# Altium PCB CORE_FPGA.PcbDoc (part 1 of 3)
Units mil, origin at the board's own origin, x right, y up, seen from the top; angles counter-clockwise.
Board outline 2362.21 x 2755.91 mil, 6 copper layers (TOP, GND, PWR1, PWR2, 3.3V, BOTTOM), stack 58.111 mil thick; 162 components, 160 nets, 858 pads, 377 vias.
Unrouted connection lines stored in the file: 4.
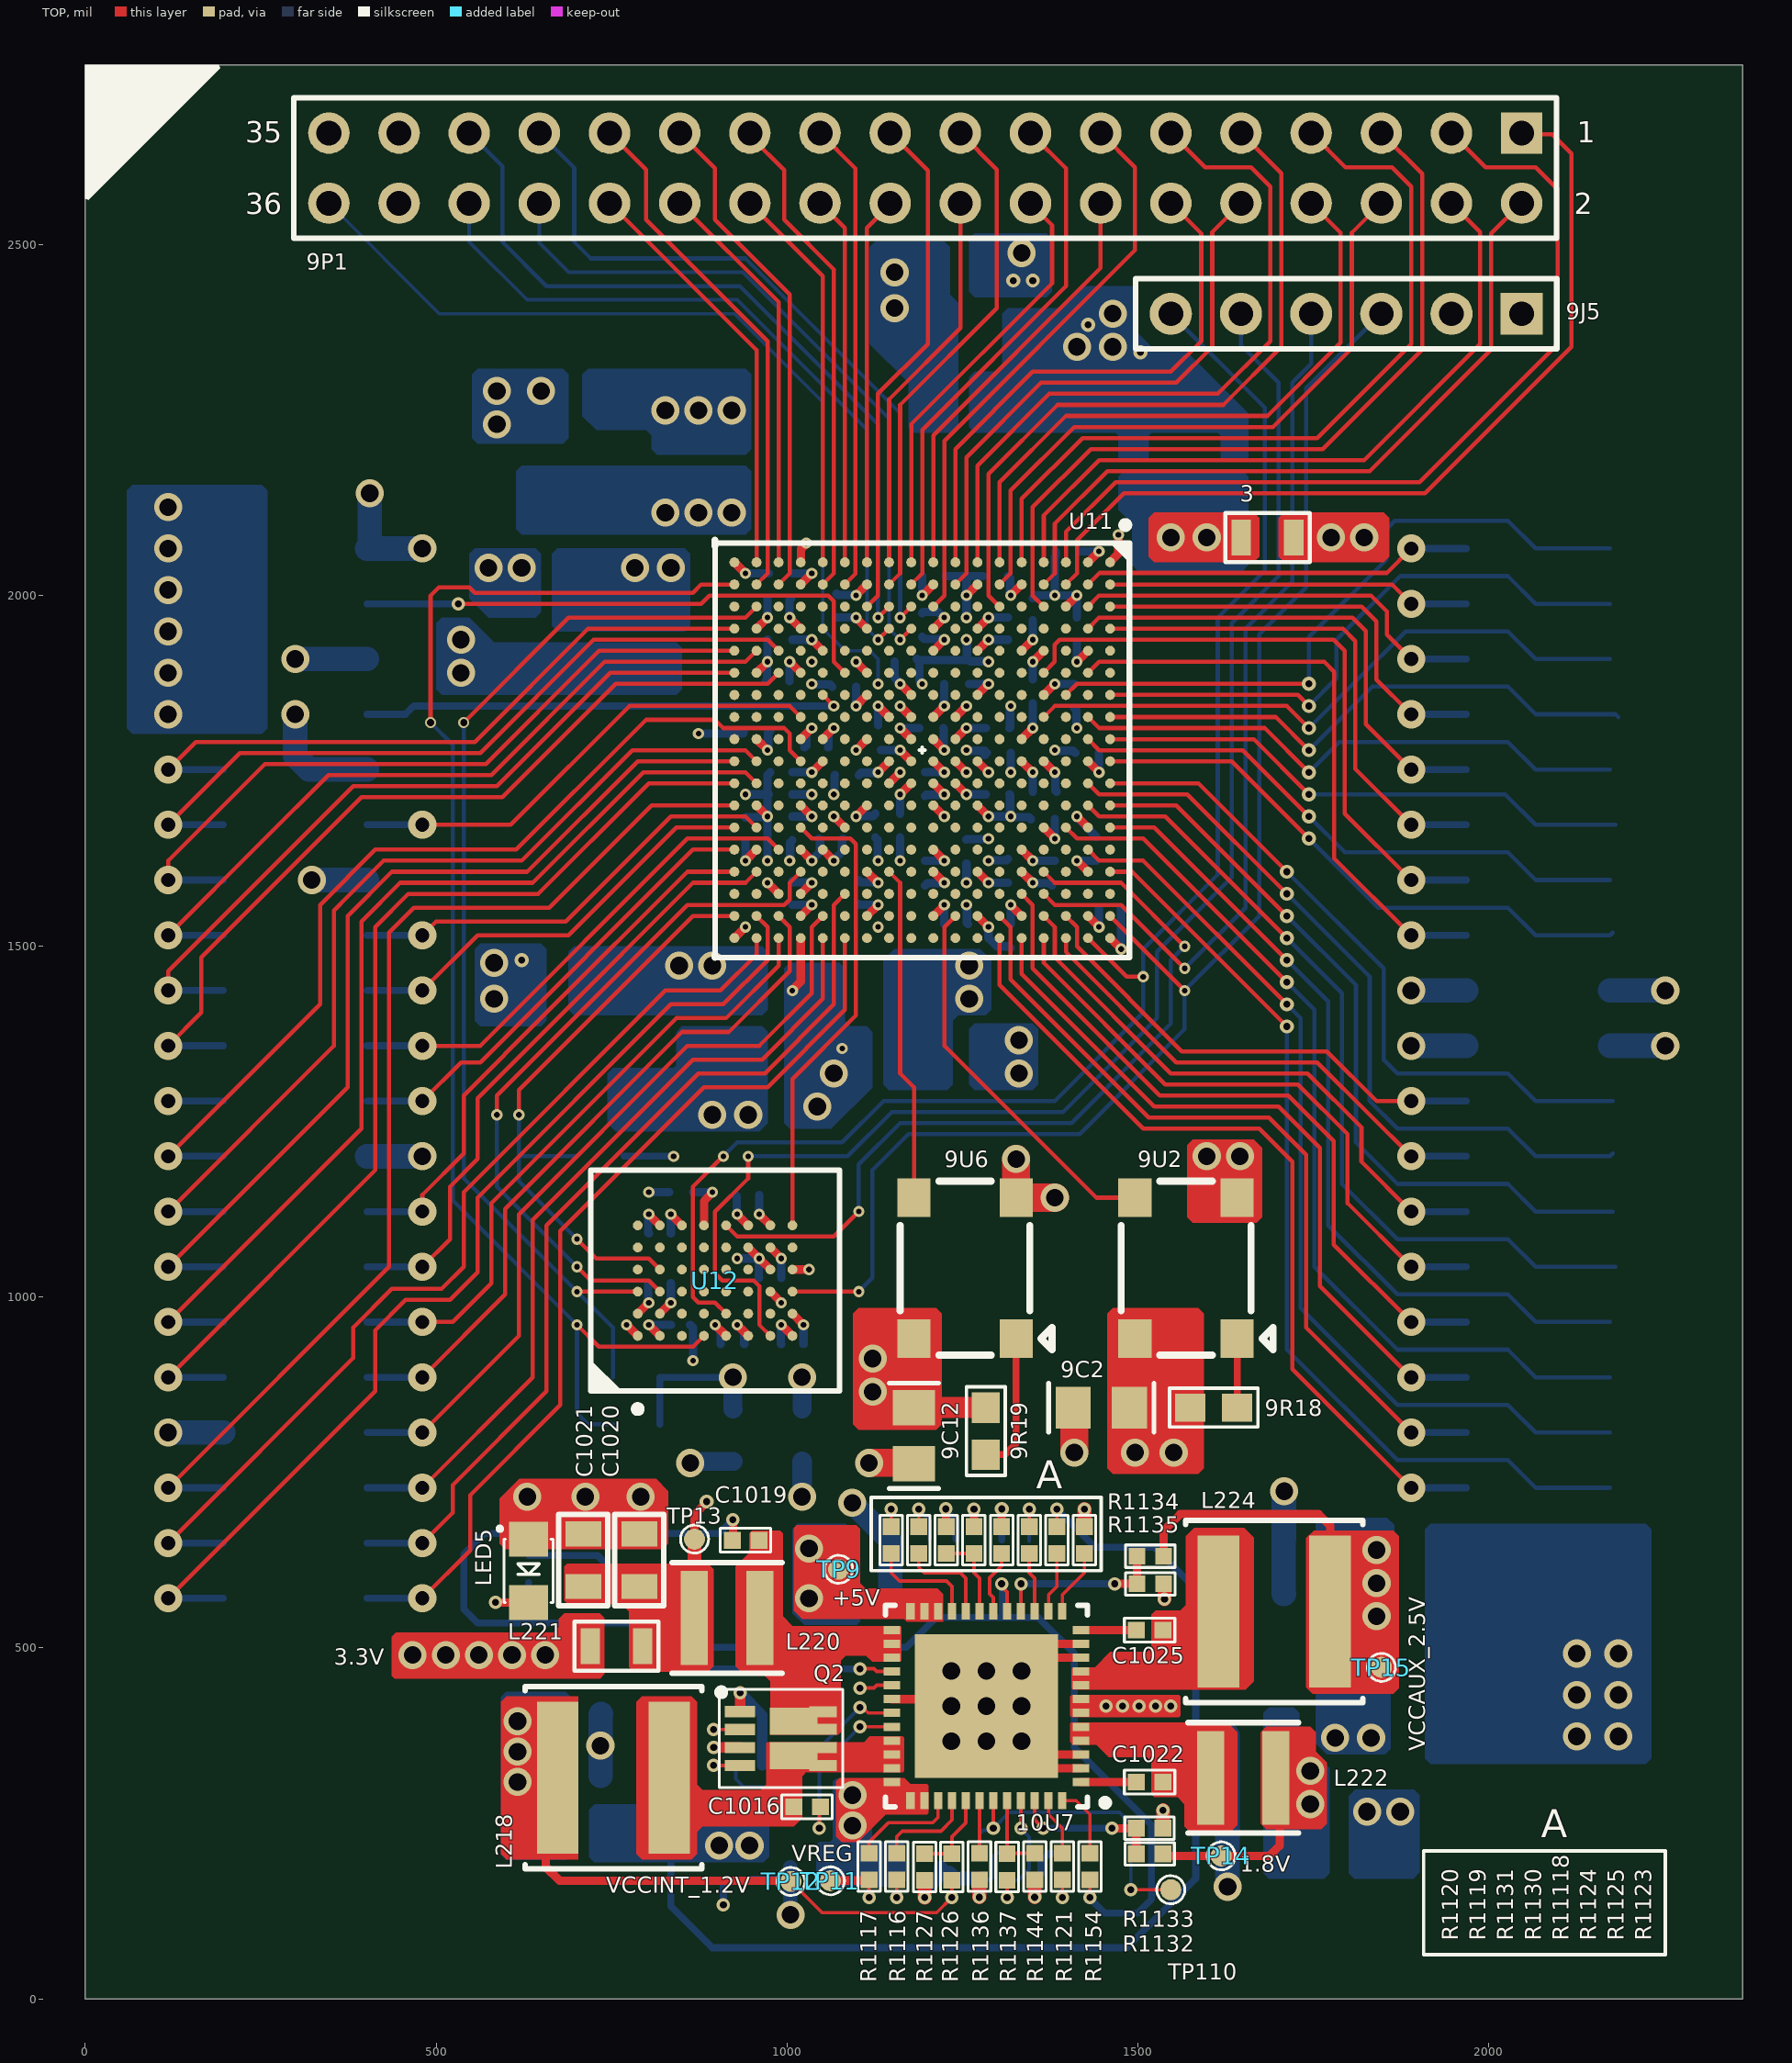
[diagram p0: TOP view]
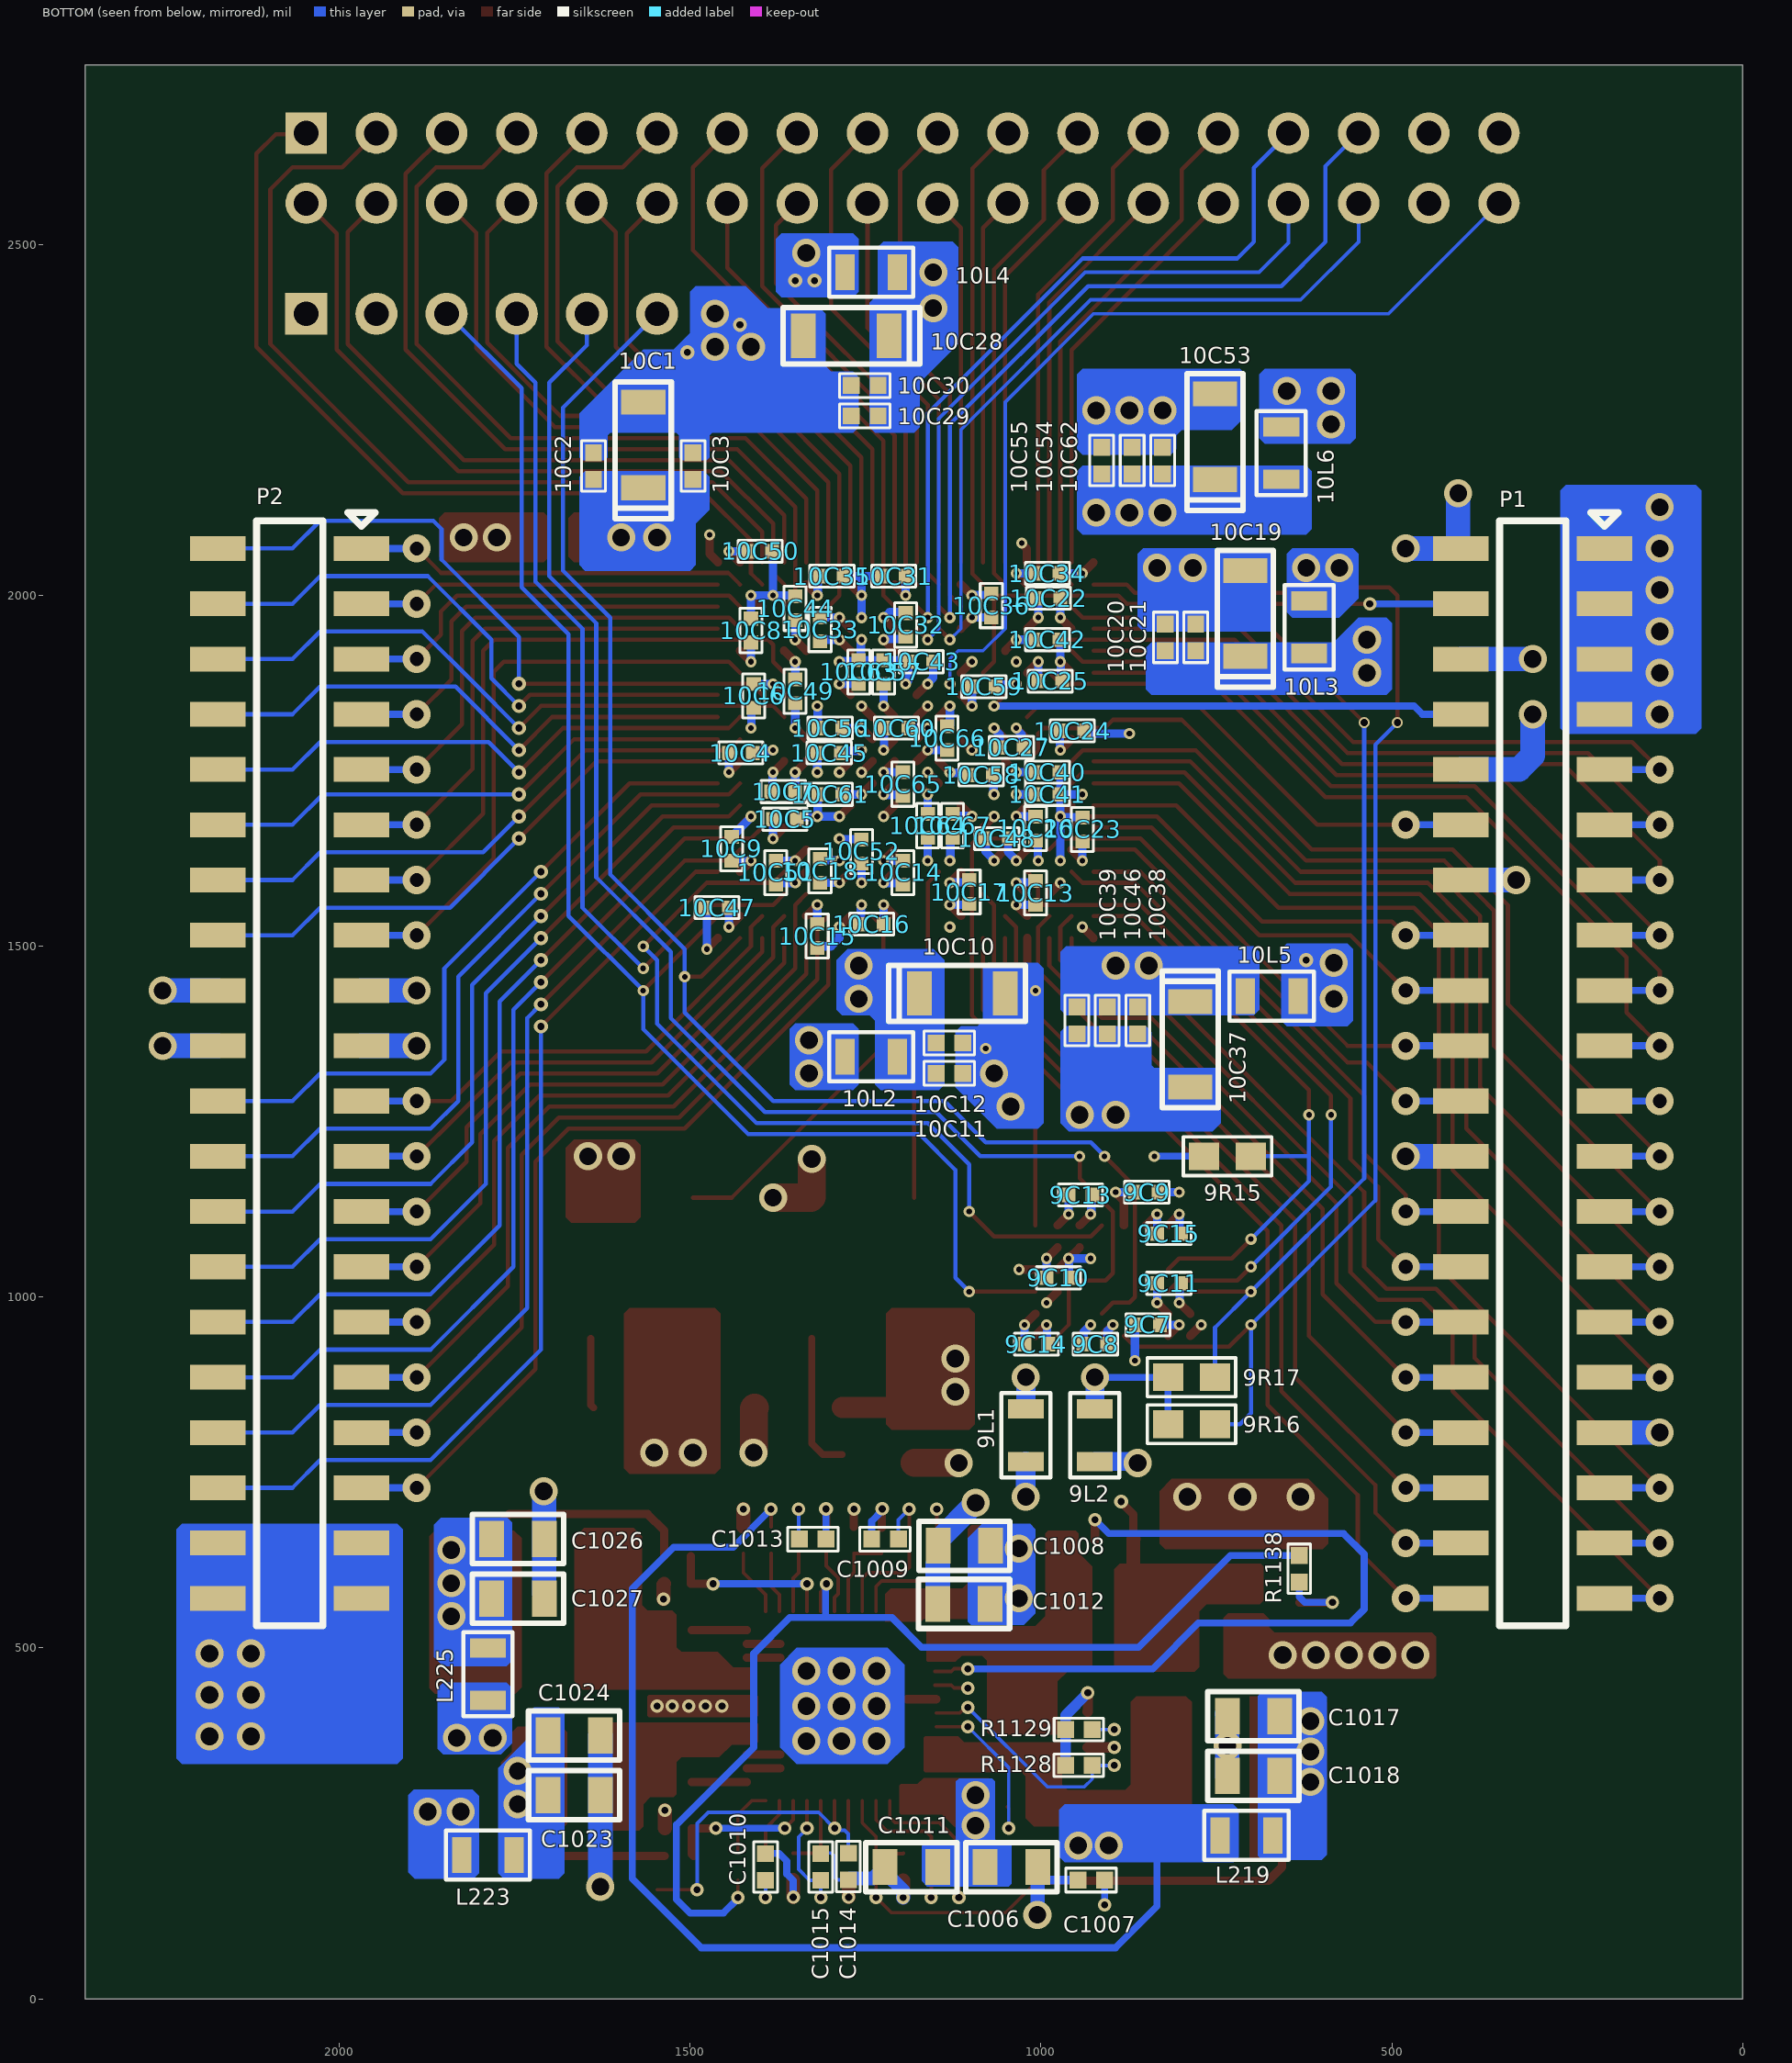
[diagram p1: BOTTOM view, seen from below]
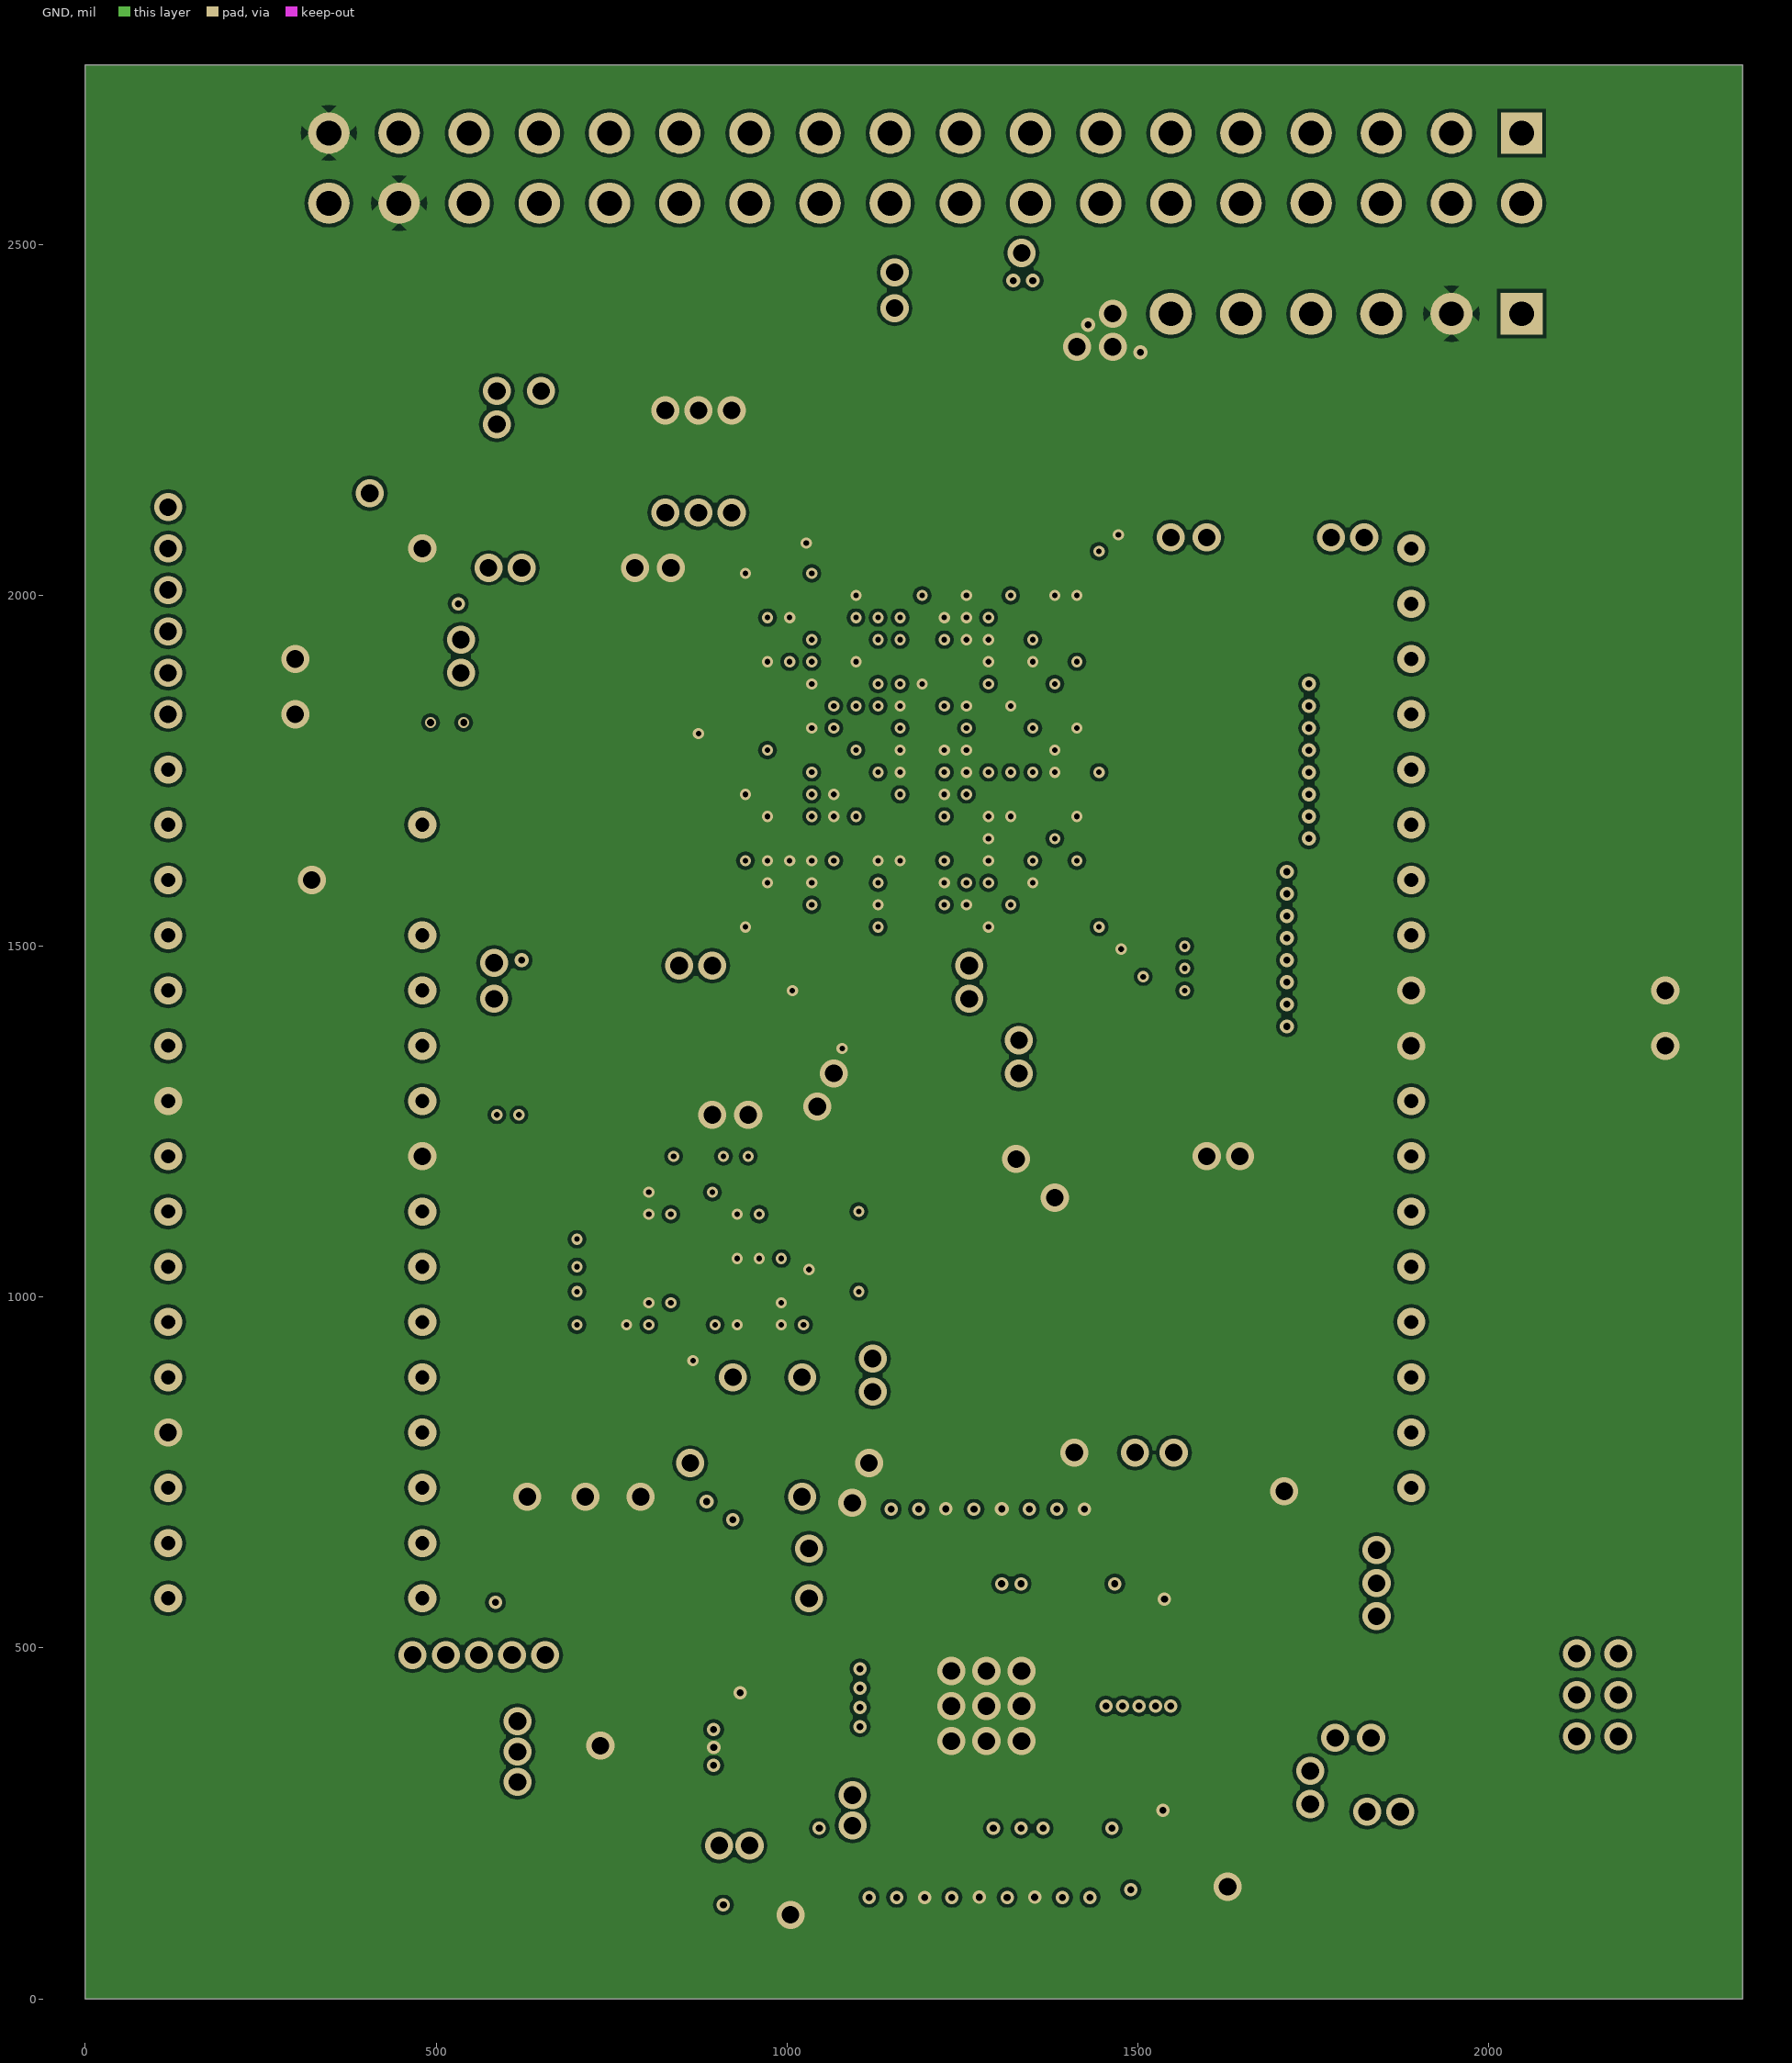
[diagram p2: GND]
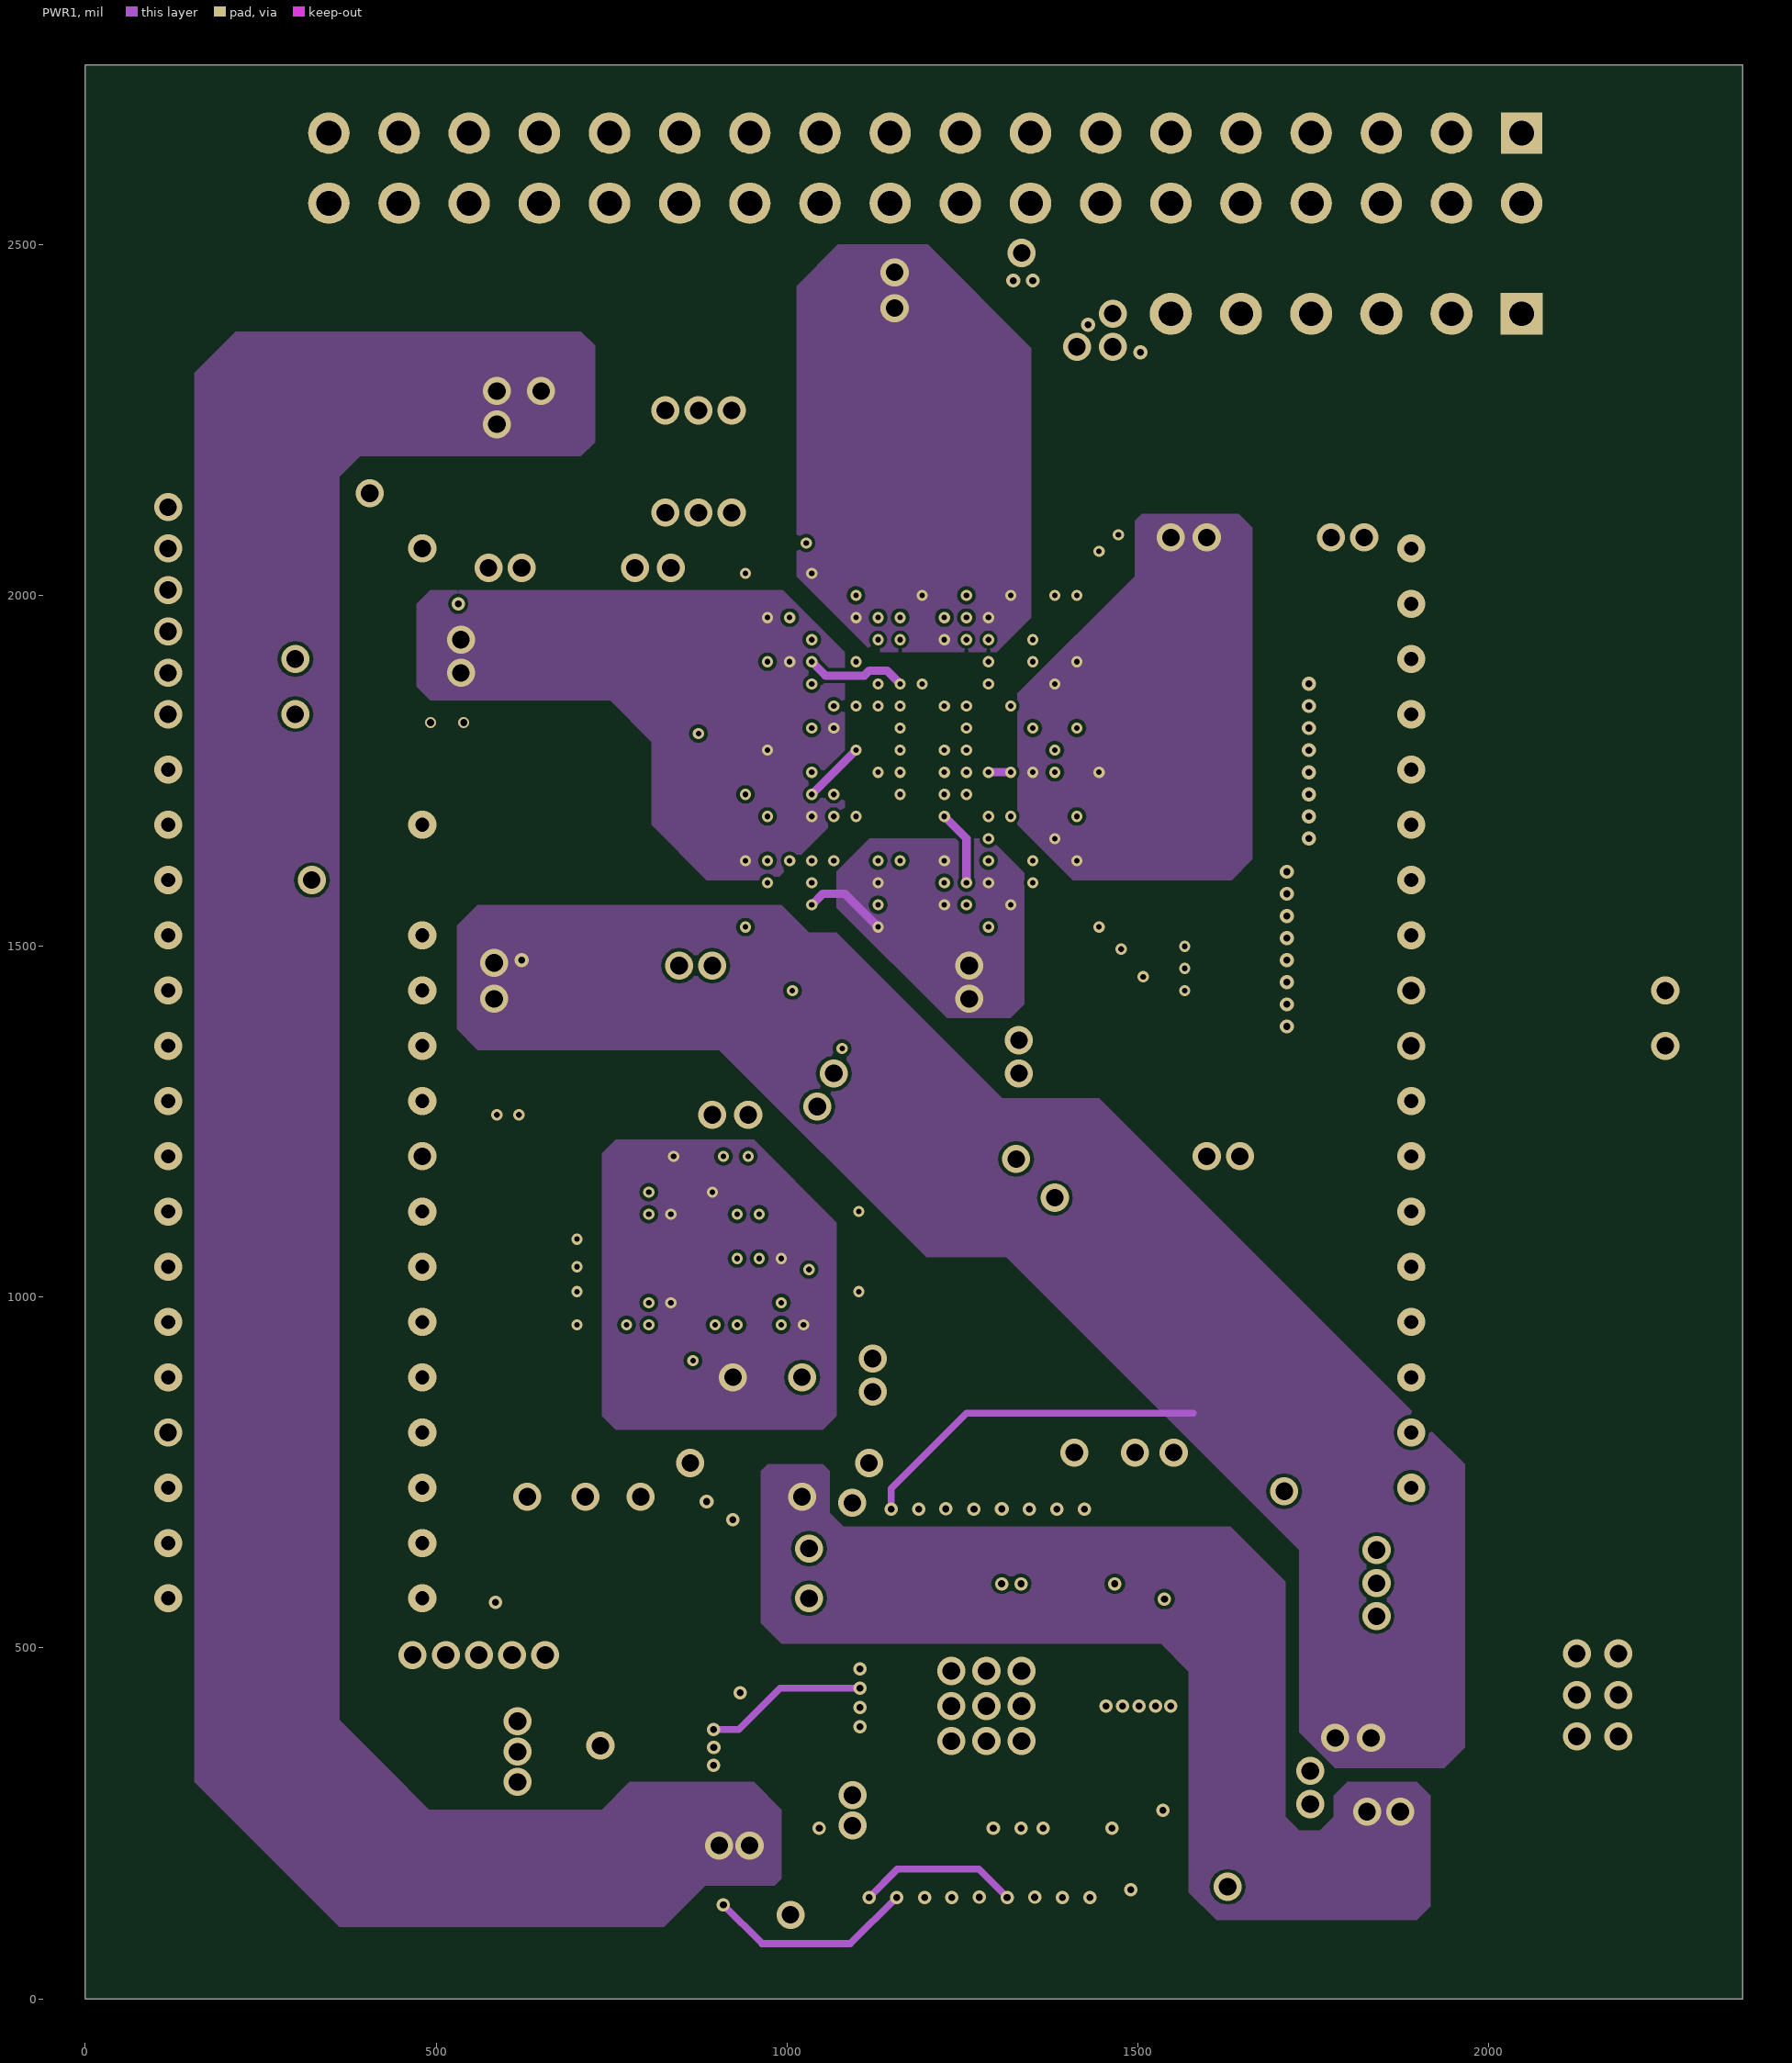
[diagram p3: PWR1]
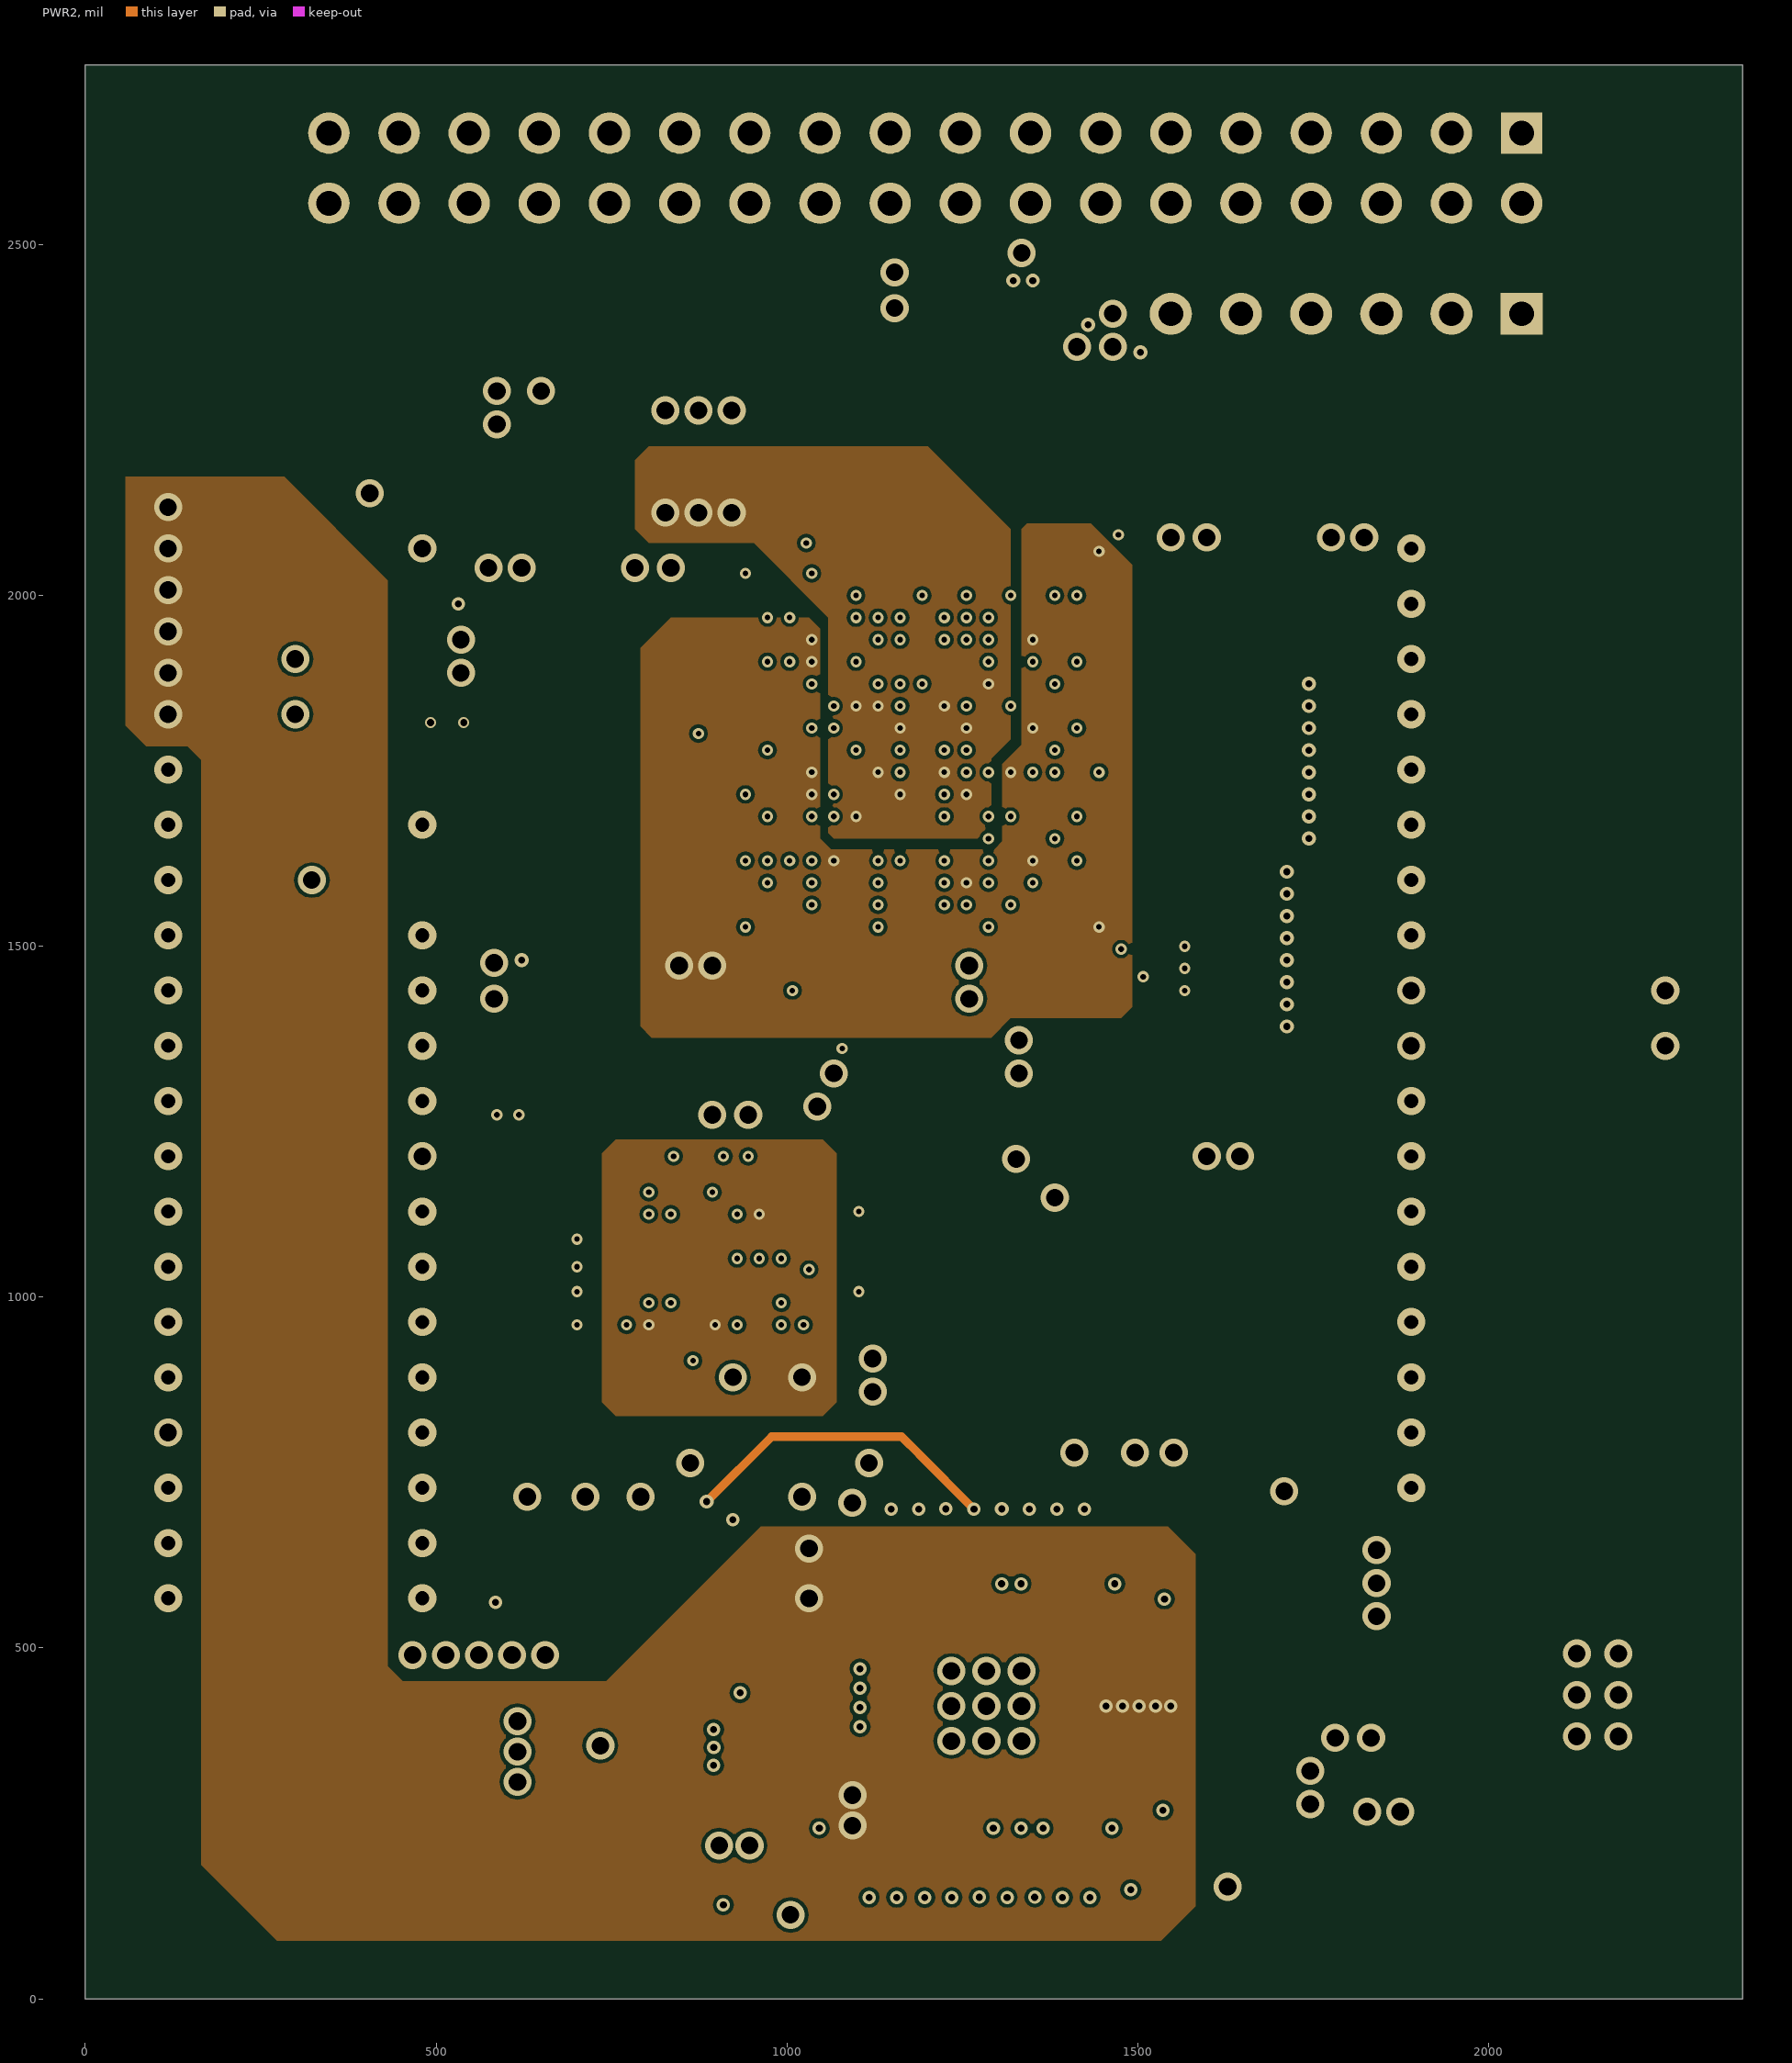
[diagram p4: PWR2]
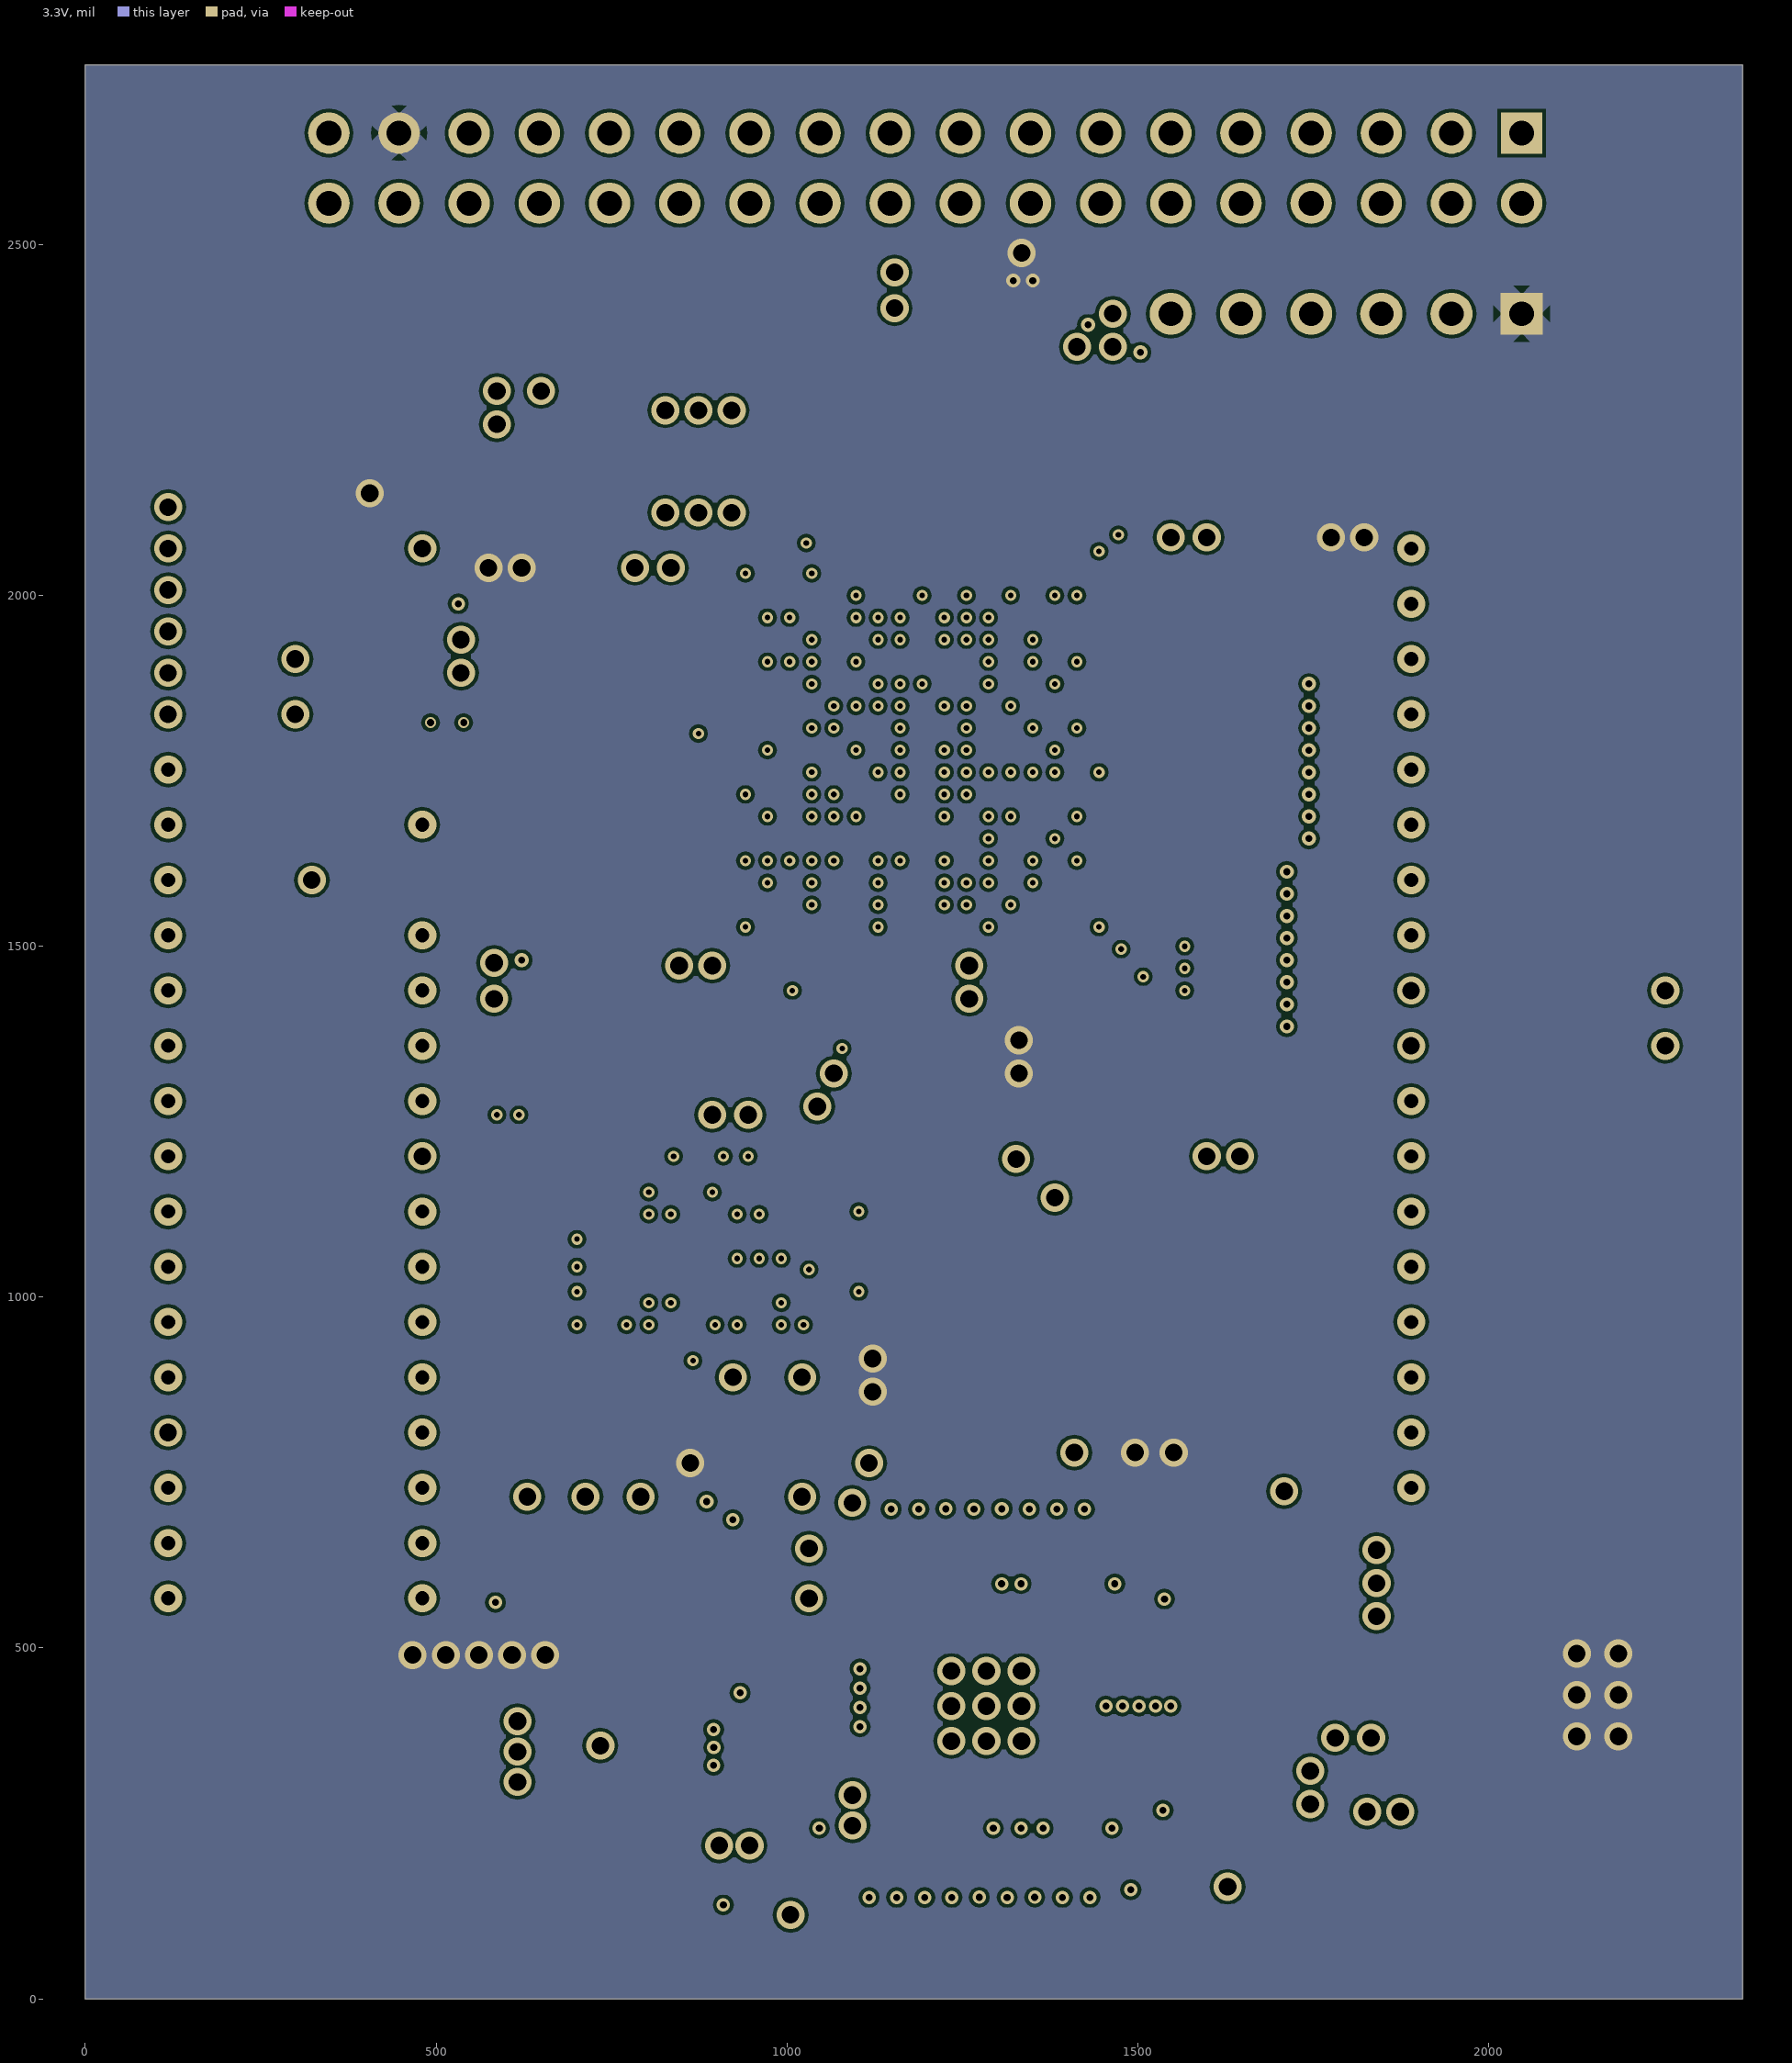
[diagram p5: 3.3V]

## Layer stack, top to bottom
Top Solder: solder mask 0.4, Solder Resist, Dk 3.2
TOP: signal copper 2
Dielectric 1-2: prepreg 4.3, FR-4, Dk 4.04
GND: signal copper 1.3778
Dielectric 2-3: core 6, FR-4, Dk 4.04
PWR1: signal copper 1.3778
Dielectric 3-4: prepreg 28, FR-4, Dk 4.04
PWR2: signal copper 1.3778
Dielectric 4-5: core 6, FR-4, Dk 4.04
3.3V: signal copper 1.3778
Dielectric 5-6: prepreg 4.3, FR-4, Dk 4.04
BOTTOM: signal copper 2
Bottom Solder: solder mask 0.4, Solder Resist, Dk 3.2

## Board outline
0,0 2362.2,0 2362.2,2755.91 0,2755.91

## Design rules (kind name [scope] priority, off if disabled: settings)
AcuteAngle [All] p1 off: minimum=4.50000000000000E+0001 checktracksonly=TRUE
AssemblyTestPointUsage [All] p1 off:
AssemblyTestpoint [All] p1 off: testpointundercomponent=TRUE minsize=40 maxsize=100 preferedsize=60 minholesize=0 maxholesize=40 preferedholesize=32 testpointgrid=1 usegrid=TRUE gridtolerance=0.01 allowsidetop=TRUE allowsidebottom=TRUE
Clearance [All] p1: gap=5 ignorepadtopadclearanceinfootprint=FALSE except(0: Arc-Hole Track-Hole SMDPad-Hole THPad-Hole Via-Hole Fill-Hole Poly-Hole Region-Hole Text-Hole; 6: Arc-Fill Track-Fill SMDPad-Fill THPad-Fill Via-Fill Fill-Fill)
ComponentClearance [All] p1: gap=0 collisioncheckmode=3 verticalgap=7.87 showdistances=FALSE
FabricationTestPointUsage TestPointUsage [All] p1 off: valid=0 allowmultiple=FALSE
FabricationTestpoint Testpoint [All] p1 off: side=3 testpointundercomponent=TRUE minsize=40 maxsize=100 preferedsize=60 minholesize=0 maxholesize=40 preferedholesize=32 testpointgrid=1 allowsidetop=TRUE allowsidebottom=TRUE usegrid=TRUE gridtolerance=0.01
FanoutControl Fanout_BGA [IsBGA] p1: bgadir=Out bgaviamode=Closest fanoutstyle=Auto fanoutdirection=None viagrid=1 // Fanout_BGA (Default Rule)
FanoutControl Fanout_LCC [IsLCC] p2: bgadir=Out bgaviamode=Closest fanoutstyle=Auto fanoutdirection=None viagrid=1 // Fanout_LCC (Default Rule)
FanoutControl Fanout_SOIC [IsSOIC] p3: bgadir=Out bgaviamode=Closest fanoutstyle=Auto fanoutdirection=None viagrid=1 // Fanout_SOIC (Default Rule)
FanoutControl Fanout_Small [(CompPinCount < 5)] p4: bgadir=Out bgaviamode=Closest fanoutstyle=Auto fanoutdirection=None viagrid=1 // Fanout_Small (Default Rule)
FanoutControl Fanout_Default [All] p5: bgadir=Out bgaviamode=Closest fanoutstyle=Auto fanoutdirection=None viagrid=1 // Fanout_Default (Default Rule)
HoleSize [All] p1: absolutevalues=TRUE maxlimit=250 minlimit=7.5 maxpercent=80.000 minpercent=20.000
MatchedLengths MatchedLengths_P6RX [InxSignalClass('P6RX')] p1: tolerance=100 checknetsindiffpair=FALSE checkdiffpairvsdiffpair=TRUE checkxsignals=TRUE checkothers=TRUE
MatchedLengths MatchedLengths_P7RX [InxSignalClass('P7RX')] p2: tolerance=100 checknetsindiffpair=FALSE checkdiffpairvsdiffpair=TRUE checkxsignals=TRUE checkothers=TRUE
MatchedLengths MatchedLengths_P7TX [InxSignalClass('P7TX')] p3: tolerance=100 checknetsindiffpair=FALSE checkdiffpairvsdiffpair=TRUE checkxsignals=TRUE checkothers=TRUE
MatchedLengths MatchedLengths_P6TX [InxSignalClass('P6TX')] p4: tolerance=100 checknetsindiffpair=FALSE checkdiffpairvsdiffpair=TRUE checkxsignals=TRUE checkothers=TRUE
MatchedLengths MatchedLengths_RX [InNetClass('RGMII_RX')] p5: tolerance=50 checknetsindiffpair=TRUE checkdiffpairvsdiffpair=FALSE checkxsignals=FALSE checkothers=FALSE
MatchedLengths MatchedLengths_USB3. [InNetClass('USB3.')] p6: tolerance=5 checknetsindiffpair=TRUE checkdiffpairvsdiffpair=FALSE checkxsignals=FALSE checkothers=FALSE
MatchedLengths MatchedLengths_DisplayPort [InNetClass('DisplayPort')] p7: tolerance=5 checknetsindiffpair=TRUE checkdiffpairvsdiffpair=FALSE checkxsignals=FALSE checkothers=FALSE
MatchedLengths MatchedLengths_USB2. [InNetClass('USB2.')] p8: tolerance=50 checknetsindiffpair=TRUE checkdiffpairvsdiffpair=FALSE checkxsignals=FALSE checkothers=FALSE
MatchedLengths MatchedLengths_TX [InNetClass('RGMII_TX')] p9: tolerance=50 checknetsindiffpair=TRUE checkdiffpairvsdiffpair=FALSE checkxsignals=FALSE checkothers=FALSE
MatchedLengths MatchedLengths_GBE1. [InNetClass('GBE1.')] p10: tolerance=50 checknetsindiffpair=TRUE checkdiffpairvsdiffpair=FALSE checkxsignals=FALSE checkothers=FALSE
MatchedLengths MatchedLengths_GBE6. [InNetClass('GBE6.')] p11: tolerance=50 checknetsindiffpair=TRUE checkdiffpairvsdiffpair=FALSE checkxsignals=FALSE checkothers=FALSE
MatchedLengths MatchedLengths_GBE2. [InNetClass('GBE2.')] p12: tolerance=50 checknetsindiffpair=TRUE checkdiffpairvsdiffpair=FALSE checkxsignals=FALSE checkothers=FALSE
MatchedLengths MatchedLengths_GBE3. [InNetClass('GBE3.')] p13: tolerance=50 checknetsindiffpair=TRUE checkdiffpairvsdiffpair=FALSE checkxsignals=FALSE checkothers=FALSE
MatchedLengths MatchedLengths_GBE4. [InNetClass('GBE4.')] p14: tolerance=50 checknetsindiffpair=TRUE checkdiffpairvsdiffpair=FALSE checkxsignals=FALSE checkothers=FALSE
MatchedLengths MatchedLengths_GBE5. [InNetClass('GBE5.')] p15: tolerance=50 checknetsindiffpair=TRUE checkdiffpairvsdiffpair=FALSE checkxsignals=FALSE checkothers=FALSE
MatchedLengths MatchedLengths_MIC1 [InNetClass('MIC1')] p16: tolerance=50 checknetsindiffpair=TRUE checkdiffpairvsdiffpair=FALSE checkxsignals=FALSE checkothers=FALSE
MatchedLengths MatchedLengths-RGMII_RX [InNetClass('RGMII_RX')] p17: tolerance=50 checknetsindiffpair=TRUE checkdiffpairvsdiffpair=FALSE checkxsignals=FALSE checkothers=FALSE
MatchedLengths MatchedLengths-RGMII_RX6 [InNetClass('RGMII_RX6')] p18: tolerance=50 checknetsindiffpair=FALSE checkdiffpairvsdiffpair=TRUE checkxsignals=TRUE checkothers=TRUE
MatchedLengths MatchedLengths-RGMII_TX6 [InNetClass('RGMII_TX6')] p19: tolerance=50 checknetsindiffpair=FALSE checkdiffpairvsdiffpair=TRUE checkxsignals=TRUE checkothers=TRUE
MatchedLengths MatchedLengths-RGMII_RX7 [InNetClass('RGMII_RX7')] p20: tolerance=50 checknetsindiffpair=FALSE checkdiffpairvsdiffpair=TRUE checkxsignals=TRUE checkothers=TRUE
MatchedLengths MatchedLengths-RGMII_TX7 [InNetClass('RGMII_TX7')] p21: tolerance=50 checknetsindiffpair=FALSE checkdiffpairvsdiffpair=TRUE checkxsignals=TRUE checkothers=TRUE
MatchedLengths MatchedLengths-RGMII_TX [InNetClass('RGMII_TX')] p22: tolerance=50 checknetsindiffpair=TRUE checkdiffpairvsdiffpair=FALSE checkxsignals=FALSE checkothers=FALSE
MatchedLengths MatchedLengths-ADC_BUF [InNetClass('ADC_BUF')] p23: tolerance=50 checknetsindiffpair=TRUE checkdiffpairvsdiffpair=FALSE checkxsignals=FALSE checkothers=FALSE
MatchedLengths MatchedLengths-RX2 [InNetClass('RX2')] p24: tolerance=50 checknetsindiffpair=TRUE checkdiffpairvsdiffpair=FALSE checkxsignals=FALSE checkothers=FALSE
MatchedLengths MatchedLengths-TX2 [InNetClass('TX2')] p25: tolerance=50 checknetsindiffpair=TRUE checkdiffpairvsdiffpair=FALSE checkxsignals=FALSE checkothers=FALSE
MatchedLengths MatchedLengths-TX3 [InNetClass('TX3')] p26: tolerance=50 checknetsindiffpair=TRUE checkdiffpairvsdiffpair=FALSE checkxsignals=FALSE checkothers=FALSE
MatchedLengths MatchedLengths-X2J [InNetClass('X2J')] p27: tolerance=50 checknetsindiffpair=TRUE checkdiffpairvsdiffpair=FALSE checkxsignals=FALSE checkothers=FALSE
MatchedLengths MatchedLengths-X3J [InNetClass('X3J')] p28: tolerance=50 checknetsindiffpair=TRUE checkdiffpairvsdiffpair=FALSE checkxsignals=FALSE checkothers=FALSE
MatchedLengths MatchedLengths-TX3R [InNetClass('TX3R')] p29: tolerance=50 checknetsindiffpair=TRUE checkdiffpairvsdiffpair=FALSE checkxsignals=FALSE checkothers=FALSE
MatchedLengths MatchedLengths-TX2R [InNetClass('TX2R')] p30: tolerance=50 checknetsindiffpair=TRUE checkdiffpairvsdiffpair=FALSE checkxsignals=FALSE checkothers=FALSE
MatchedLengths MatchedLengths-RX3 [InNetClass('RX3')] p31: tolerance=50 checknetsindiffpair=TRUE checkdiffpairvsdiffpair=FALSE checkxsignals=FALSE checkothers=FALSE
MatchedLengths MatchedLengths-RX3R [InNetClass('RX3R')] p32: tolerance=50 checknetsindiffpair=TRUE checkdiffpairvsdiffpair=FALSE checkxsignals=FALSE checkothers=FALSE
MatchedLengths MatchedLengths-RX2R [InNetClass('RX2R')] p33: tolerance=50 checknetsindiffpair=TRUE checkdiffpairvsdiffpair=FALSE checkxsignals=FALSE checkothers=FALSE
MatchedLengths MatchedLengths-BUF_DUT [InNetClass('BUF_DUT')] p34: tolerance=50 checknetsindiffpair=TRUE checkdiffpairvsdiffpair=FALSE checkxsignals=FALSE checkothers=FALSE
MatchedLengths [InNetClass('GBE')] p35: tolerance=50 checknetsindiffpair=TRUE checkdiffpairvsdiffpair=FALSE checkxsignals=FALSE checkothers=FALSE
MatchedLengths MatchedLengths-GBE_OUT [InNetClass('GBE_OUT')] p36: tolerance=25 checknetsindiffpair=TRUE checkdiffpairvsdiffpair=FALSE checkxsignals=FALSE checkothers=FALSE
MaxMinImpedance [All] p1: minimum=10.00m maximum=55.00
MinimumSolderMaskSliver [All] p1: minsoldermaskwidth=4
NetAntennae NetAntennae_Via [IsVia] p1 off: netantennaetolerance=50
NetAntennae NetAntennae_Track [IsTrack] p2: netantennaetolerance=0
PlaneClearance [All] p1: clearance=7
PlaneConnect PlaneConnect_via [isvia] p1: planeconnectstyle=Direct reliefexpansion=19.68 reliefentries=4 reliefconductorwidth=11.81 reliefairgap=11.81
PlaneConnect PlaneConnect_all [All] p2: planeconnectstyle=Relief reliefexpansion=20 reliefentries=4 reliefconductorwidth=40 reliefairgap=10
PolygonConnect PolygonConnect_VIA [All vs iSVia] p1: connectstyle=Direct reliefconductorwidth=10 reliefentries=4 polygonreliefangle="90 Angle" airgapwidth=10
PolygonConnect [All] p2: connectstyle=Relief reliefconductorwidth=40 reliefentries=4 polygonreliefangle="45 Angle" airgapwidth=10
RoutingCorners [All] p1: cornerstyle=45-Degree minsetback=20 maxsetback=20
RoutingVias [All] p1: holewidth=20 width=40 viastyle="Through Hole" minholewidth=8 minwidth=16 maxholewidth=50 maxwidth=100
SMDToCorner [All] p1: distance=0
SignalStimulus [All] p1: kind=1 level=0 starttime=100.0m stoptime=100.0m periodtime=200.0m
SilkToBoardRegionClearance SilkToBoardRegionClearance_1 [All] p1 off:
SilkToSilkClearance [All] p1: silktosilkclearance=0.01
SilkToSolderMaskClearance SilkscreenOverComponentPads [IsPad] p1: minsilkscreentomaskgap=0.1 clearancetoexposedcopper=TRUE
SilkToSolderMaskClearance SilkscreentoViaMask [IsVia] p2 off: minsilkscreentomaskgap=0 clearancetoexposedcopper=FALSE
SlopeFalling [All] p1: maxslope=10.00m
SlopeRising [All] p1: maxslope=10.00m
SolderMaskExpansion [All] p1: expansion=2 istentingtop=FALSE
Width [All] p1: maxlimit=250 minlimit=5 preferedwidth=7 toplayer_prefwidth=5 midlayer1_prefwidth=5 midlayer2_prefwidth=5 bottomlayer_prefwidth=5 minimp=50.000000 maximp=50.000000 favimp=50.000000
11 further rules are at their usual default settings.

## Classes and differential pairs
component class FPGA: 9C2 9C7 9C8 9C9 9C10 9C11 9C12 9C13 9C14 9C15 9J5 9L1 9L2 9P1 9R15 9R16 9R17 9R18 9R19 9U2 9U6 P1 P2 U11 U12
component class FPGA_PWR: 3 10C1 10C2 10C3 10C4 10C5 10C6 10C7 10C8 10C9 10C10 10C11 10C12 10C13 10C14 10C15 10C16 10C17 10C18 10C19 10C20 10C21 10C22 10C23 10C24 10C25 10C26 10C27 10C28 10C29 10C30 10C31 10C32 10C33 10C34 10C35 10C36 10C37 10C38 10C39 10C40 10C41 10C42 10C43 10C44 10C45 10C46 10C47 10C48 10C49 10C50 10C51 10C52 10C53 10C54 10C55 10C56 10C57 10C58 10C59 10C60 10C61 10C62 10C63 10C64 10C65 10C66 10C67 10L2 10L3 10L4 10L5 10L6 10U7 C1006 C1007 C1008 C1009 C1010 C1011 C1012 C1013 C1014 C1015 C1016 C1017 C1018 C1019 C1020 C1021 C1022 C1023 C1024 C1025 C1026 C1027 L218 L219 L220 L221 L222 L223 L224 L225 LED5 Q2 R1116 R1117 R1119 R1120 R1121 R1123 R1124 R1125 R1126 R1127 R1128 R1129 R1130 R1131 R1132 R1133 R1134 R1135 R1136 R1137 R1138 R1144 R1154 R11118 TP9 TP11 TP12 TP13 TP14 TP15 TP110

## Components (designator, comment, footprint, x,y, rotation, side; value= is the part's Value field where it differs from the comment)
3 "FB 6A" 0805 1685.04,2082.68 r0 top (schematic designator 10L1)
9C2 "CAP1" 0805C 1408.19,842.52 r180 top
9C7 "100nF" C0402 847.71,960.63 r180 bottom
9C8 "100nF" C0402 922.51,933.07 r180 bottom
9C9 "100nF" C0402 849.14,1149.61 r0 bottom
9C10 "100nF" C0402 975.13,1027.56 r0 bottom
9C11 "100nF" C0402 817.65,1019.68 r0 bottom
9C12 "CAP1" 0805C 1181.1,762.52 r270 top
9C13 "100nF" C0402 943.63,1145.67 r0 bottom
9C14 "100nF" C0402 1006.62,933.07 r0 bottom
9C15 "100nF" C0402 817.65,1090.55 r0 bottom
9J5 "JTAG" "HDR 1X6" 2047.24,2401.57 r180 top locked
9L1 "FB 6A" 0805 1021.65,803.15 r270 bottom
9L2 "FB 6A" 0805 923.23,803.15 r90 bottom
9P1 "Header 18X2" HDR2X18 2047.24,2659.06 r180 top locked
9R15 "4.7K" 0603_1 734.25,1200.79 r0 bottom
9R16 "4.7K" 0603_1 785.43,818.9 r0 bottom
9R17 "4.7K" 0603_1 785.43,885.83 r0 bottom
9R18 "4.7K" 0603_1 1608.27,842.52 r0 top
9R19 "4.7K" 0603_1 1283.46,809.06 r270 top
9U2 "2.048MHz" CB3LV-3I-2M0480 1641.73,940.94 r90 top locked
9U6 "50MHz" CB3LV-3I-2M0480 1326.77,940.94 r90 top locked
10C1 "100uF" "C1206 - P" 1566.93,2214.57 r90 bottom
10C2 "0.47UF" C0402_1 1637.8,2184.35 r270 bottom
10C3 "0.1uF" C0402_1 1496.06,2184.35 r270 bottom
10C4 "0.01uF" C0402 1427.88,1775.59 r0 bottom
10C5 "0.01uF" C0402 1364.89,1681.1 r0 bottom
10C6 "0.01uF" C0402 1409.45,1857.02 r90 bottom
10C7 "0.01uF" C0402 1367.39,1720.47 r180 bottom
10C8 "0.01uF" C0402 1413.39,1950.07 r270 bottom
10C9 "0.01uF" C0402 1440.94,1639.05 r270 bottom
10C10 "100uF" "C1206 - P" 1112.2,1433.07 r180 bottom
10C11 "0.47UF" C0402_1 1130.61,1318.9 r0 bottom
10C12 "0.1uF" C0402_1 1130.61,1362.2 r0 bottom
10C13 "0.01uF" C0402 1007.87,1576.06 r270 bottom
10C14 "0.01uF" C0402 1196.85,1605.05 r90 bottom
10C15 "0.01uF" C0402 1318.9,1514.5 r90 bottom
10C16 "0.01uF" C0402 1241.41,1531.5 r180 bottom
10C17 "0.01uF" C0402 1102.36,1577.49 r90 bottom
10C18 "0.01uF" C0402 1314.96,1607.55 r270 bottom
10C19 "100uF" "C1206 - P" 708.66,1974.41 r90 bottom
10C20 "0.47UF" C0402_1 822.83,1940.26 r270 bottom
10C21 "0.1uF" C0402_1 779.53,1940.26 r270 bottom
10C22 "0.01uF" C0402 989.44,1996.06 r180 bottom
10C23 "0.01uF" C0402 940.94,1666.61 r270 bottom
10C24 "0.01uF" C0402 955.44,1807.09 r0 bottom
10C25 "0.01uF" C0402 986.94,1877.95 r0 bottom
10C26 "0.01uF" C0402 1007.87,1668.04 r90 bottom
10C27 "0.01uF" C0402 1042.06,1783.46 r0 bottom
10C28 "100uF" "C1206 - P" 1277.56,2370.08 r0 bottom
10C29 "0.47UF" C0402_1 1251.28,2255.91 r180 bottom
10C30 "0.1uF" C0402_1 1251.28,2299.21 r180 bottom
10C31 "0.01uF" C0402 1209.91,2027.56 r180 bottom
10C32 "0.01uF" C0402 1192.91,1957.94 r270 bottom
10C33 "0.01uF" C0402 1314.96,1951.5 r90 bottom
10C34 "0.01uF" C0402 990.87,2031.5 r0 bottom
10C35 "0.01uF" C0402 1297.96,2027.56 r0 bottom
10C36 "0.01uF" C0402 1070.87,1985.5 r270 bottom
10C37 "100uF" "C1206 - P" 787.4,1360.24 r270 bottom
10C38 "0.47UF" C0402_1 862.2,1394.39 r90 bottom
10C39 "0.1uF" C0402_1 948.82,1394.39 r90 bottom
10C40 "0.01uF" C0402 990.87,1748.03 r0 bottom
10C41 "0.01uF" C0402 990.87,1716.54 r0 bottom
10C42 "0.01uF" C0402 990.87,1937.01 r0 bottom
10C43 "0.01uF" C0402 1170.54,1905.51 r180 bottom
10C44 "0.01uF" C0402 1350.39,1981.57 r270 bottom
10C45 "0.01uF" C0402 1301.9,1775.59 r0 bottom
10C46 "0.1uF" C0402_1 905.51,1394.39 r90 bottom
10C47 "0.01uF" C0402 1461.88,1555.12 r180 bottom
10C48 "0.01uF" C0402 1062.99,1653.54 r0 bottom
10C49 "0.01uF" C0402 1350.39,1863.46 r270 bottom
10C50 "0.01uF" C0402 1400.32,2062.99 r0 bottom
10C51 "0.01uF" C0402 1377.95,1605.05 r90 bottom
10C52 "0.01uF" C0402 1255.91,1635.11 r270 bottom
10C53 "100uF" "C1206 - P" 751.97,2226.38 r90 bottom
10C54 "0.47UF" C0402_1 870.08,2192.23 r270 bottom
10C55 "0.1uF" C0402_1 913.39,2192.23 r270 bottom
10C56 "0.01uF" C0402 1300.46,1811.02 r180 bottom
10C57 "0.01uF" C0402 1224.41,1891.02 r270 bottom
10C58 "0.01uF" C0402 1085.36,1744.09 r0 bottom
10C59 "0.01uF" C0402 1081.43,1870.08 r0 bottom
10C60 "0.01uF" C0402 1205.98,1811.02 r180 bottom
10C61 "0.01uF" C0402 1300.46,1716.54 r180 bottom
10C62 "0.1uF" C0402_1 826.77,2192.23 r270 bottom
10C63 "0.01uF" C0402 1259.84,1891.02 r270 bottom
10C64 "0.01uF" C0402 1161.42,1671.98 r90 bottom
10C65 "0.01uF" C0402 1196.85,1731.03 r90 bottom
10C66 "0.01uF" C0402 1133.86,1796.53 r90 bottom
10C67 "0.01uF" C0402 1125.98,1671.98 r90 bottom
10L2 "FB 6A" 0805 1242.13,1342.52 r0 bottom
10L3 "FB 6A" 0805 618.11,1954.72 r90 bottom
10L4 "FB 6A" 0805 1242.13,2460.63 r0 bottom
10L5 "FB 6A" 0805 671.26,1429.13 r180 bottom
10L6 "FB 6A" 0805 657.48,2202.76 r90 bottom
10U7 "ADP5054" 48-LFCSP 1284.38,417.29 r180 top
C1006 "10uF" C0805_1 1042.18,187.8 r180 bottom
C1007 "2.2nF" C0402_1 928.45,169.29 r180 bottom
C1008 "10uF" C0805_1 1109.18,645.63 r0 bottom
C1009 "2.2nF" C0402_1 1222.31,655.25 r180 bottom
C1010 "2.2nF" C0402_1 1392.65,187.97 r270 bottom
C1011 "10uF" C0805_1 1184.78,187.8 r0 bottom
C1012 "10uF" C0805_1 1109.78,562.8 r0 bottom
C1013 "2.2nF" C0402_1 1325.31,655.25 r0 bottom
C1014 "1uF" C0402_1 1274.54,188.64 r270 bottom
C1015 "1uF" C0402_1 1313.9,187.97 r90 bottom
C1016 "0.1uF" C0402_1 1028.78,273.58 r180 top
C1017 "47uF" C0805_1 697.18,402.8 r180 bottom
C1018 "47uF" C0805_1 697.18,317.8 r180 bottom
C1019 "0.1uF" C0402_1 941.18,653.51 r180 top
C1020 "47uF" C0805_1 789.78,625.2 r270 top
C1021 "47uF" C0805_1 709.78,625.2 r270 top
C1022 "0.1uF" C0402_1 1516.96,309.02 r0 top
C1023 "47uF" C0805_1 1665.39,290.36 r0 bottom
C1024 "47uF" C0805_1 1665.39,375.36 r0 bottom
C1025 "0.1uF" C0402_1 1516.96,525.55 r0 top
C1026 "47uF" C0805_1 1745.39,655.36 r0 bottom
C1027 "47uF" C0805_1 1745.39,570.36 r0 bottom
L218 "2.2uH" XAL6030-222MEB 752.89,314.92 r180 top
L219 "FB 6A" 0805 707.18,232.8 r0 bottom
L220 "4.7uH" XFL4020-472MEB 914.78,542.8 r180 top
L221 "FB 6A" 0805 757.18,502.8 r180 top
L222 "4.7uH" XFL4020-472MEB 1650.52,314.92 r0 top
L223 "FB 6A" 0805 1788.32,204.69 r0 bottom
L224 "2.2uH" XAL6030-222MEB 1694.62,552.13 r0 top
L225 "FB 6A" 0805 1788.32,462.56 r270 bottom
LED5 "LED GREEN" LED-0805 631.82,609.92 r270 top
P1 "Header 20X2" "HEADER 40P MALE" 196.85,2066.93 r180 bottom locked
P2 "Header 20X2" "HEADER 40P MALE" 1968.5,2066.93 r180 bottom locked
Q2 "Si7232DN" "PowerPAK 1212-8" 992.35,370.94 r0 top
R1116 "10K" 0402_1 1156.44,188.63 r90 top
R1117 "33R" 0402_1 1117.07,188.63 r90 top
R1119 "10K" 0402_1 1187.91,653.82 r270 top
R1120 "33R" 0402_1 1148.54,653.82 r270 top
R1121 "10K" 0402_1 1392.66,188.63 r90 top
R1123 "0R" 0402_1 1424.13,653.82 r270 top
R1124 "10K" 0402_1 1345.39,653.82 r270 top
R1125 "33R" 0402_1 1384.76,653.82 r270 top
R1126 "10K" 0402_1 1235.17,187.95 r90 top
R1127 "20K" 0402_1 1196.48,187.95 r90 top
R1128 "22K" 0402_1 946.09,332.65 r0 bottom
R1129 "22K" 0402_1 946.11,383.81 r180 bottom
R1130 "47K" 0402_1 1266.68,653.79 r90 top
R1131 "15K" 0402_1 1227.31,653.79 r90 top
R1132 "15K" 0402_1 1516.95,206.64 r0 top
R1133 "12K" 0402_1 1516.98,243.09 r180 top
R1134 "10K" 0402_1 1517.96,630.88 r180 top
R1135 "4.7K" 0402_1 1517.96,591.51 r180 top
R1136 "32.4K" 0402_1 1274.53,188.65 r270 top
R1137 "0R" 0402_1 1313.91,187.95 r90 top
R1138 "2.2K" 0402_1 631.81,612.84 r90 bottom
R1144 "0R" 0402_1 1353.27,188.65 r270 top
R1154 "33R" 0402_1 1432.03,188.63 r90 top
R11118 "0R" 0402_1 1306.02,653.82 r270 top
TP9 "+5V" TP 1073.75,612.17 r270 top
TP11 "VREG" TP 1061.94,168.27 r270 top
TP12 "VCCINT_1.2V" TP 1005.84,167.29 r270 top
TP13 "CFPGA_VCCO_3.3V" TP 868.34,655.18 r270 top
TP14 "VCCAUX_2.5V" TP 1619.03,203.7 r270 top
TP15 "CFPGA_1.0V" TP 1847.37,472.4 r270 top
TP110 "CFPGA_VDD_3.3V" TP 1547.18,155.47 r0 top
U11 "XC6SLX45-2CSG324C" CSG324 1192.91,1779.53 r270 top locked
U12 "XCF08PFSG48C" XCF08PFSG48C 897.64,1023.62 r90 top locked

## Footprints (in the part's own frame and the unit in brackets; to place one, negate y for a bottom-side part, rotate by r counter-clockwise, add the part's x,y. Pads: shape width x height; smd on the part's side, far side on the other; paste and mask are expansions set on the pad)
48-LFCSP [mm] "QFN, 48-Leads, Body 7.00x7.00mm, Pitch 0.50mm, Thermal Pad 5.50x5.50mm, IPC Medium Density"
  rect 0.6x0.3 smd: 1(-3.425,2.75) 2(-3.425,2.25) 3(-3.425,1.75) 4(-3.425,1.25) 5(-3.425,0.75) 6(-3.425,0.25) 7(-3.425,-0.25) 8(-3.425,-0.75) 9(-3.425,-1.25) 10(-3.425,-1.75) 11(-3.425,-2.25) 12(-3.425,-2.75) 25(3.425,-2.75) 26(3.425,-2.25) 27(3.425,-1.75) 28(3.425,-1.25) 29(3.425,-0.75) 30(3.425,-0.25) 31(3.425,0.25) 32(3.425,0.75) 33(3.425,1.25) 34(3.425,1.75) 35(3.425,2.25) 36(3.425,2.75)
  rect 0.3x0.6 smd: 13(-2.75,-3.425) 14(-2.25,-3.425) 15(-1.75,-3.425) 16(-1.25,-3.425) 17(-0.75,-3.425) 18(-0.25,-3.425) 19(0.25,-3.425) 20(0.75,-3.425) 21(1.25,-3.425) 22(1.75,-3.425) 23(2.25,-3.425) 24(2.75,-3.425) 37(2.75,3.425) 38(2.25,3.425) 39(1.75,3.425) 40(1.25,3.425) 41(0.75,3.425) 42(0.25,3.425) 43(-0.25,3.425) 44(-0.75,3.425) 45(-1.25,3.425) 46(-1.75,3.425) 47(-2.25,3.425) 48(-2.75,3.425)
  rect 5.2x5.2 smd: 49(0,0)
  silkscreen extent -4.43,-3.65 3.65,3.65, body extent -3.5,-3.5 3.5,3.5, height 0.75
0402_1 [mil]
  rect 24x24 smd mask+1.57: 1(-18.99,0.01) 2(19.01,0.01)
  silkscreen extent -35,-16 35,16, body extent -21,-11 21,11, height 16
0603_1 [mm] "RES0603"
  rect 1.1x1 smd: 1(-0.85,0) 2(0.85,0)
  silkscreen extent -1.6,-0.7 1.6,0.7
0805 [mm]
  rect 0.7x1.3 smd: 1(-0.95,0) 2(0.95,0)
  silkscreen extent -1.52,-0.89 1.52,0.89, body extent -1.02,-0.64 1.02,0.64, height 0.5
0805C [mil]
  rect 50x60 smd: 1(0,0) 2(-80,0)
  silkscreen extent -115,-35 35,35
C0402 [mm]
  rect 0.5x0.52 smd mask+0.04: 1(-0.432,0) 2(0.432,0)
  silkscreen extent -0.8,-0.4 0.8,0.4, body extent -0.52,-0.28 0.52,0.27, height 0.55
C0402_1 [mil]
  rect 24x24 smd mask+1.57: 1(-19,0) 2(19,0)
  silkscreen extent -36,-17 36,17, body extent -21,-11 21,11, height 22
C0805_1 [mm]
  rect 0.9x1.3 smd: 1(-0.95,0) 2(0.95,0)
  silkscreen extent -1.65,-0.89 1.65,0.89, body extent -1,-0.6 1,0.6, height 1.5
"C1206 - P" [mm]
  rect 0.9x1.6 smd: 1(-1.55,0) 2(1.55,0)
  silkscreen extent -2.67,-1.02 2.29,1.02, body extent -1.6,-0.8 1.6,0.8, height 1.8
CB3LV-3I-2M0480 [mm] "7mm x 5mm"
  rect 1.4x1.2 smd: 1(0,0) 2(5.1,0) 3(5.1,3.7) 4(0,3.7)
  silkscreen extent -0.6,-1.3 5.7,4.2
CSG324 [mm] "BGA, 324-Leads, Body 15x15mm, Pitch 0.8mm"
  round 0.36 smd: A1(-6.8,6.8) A2(-6,6.8) A3(-5.2,6.8) A4(-4.4,6.8) A5(-3.6,6.8) A6(-2.8,6.8) A7(-2,6.8) A8(-1.2,6.8) A9(-0.4,6.8) A10(0.4,6.8) A11(1.2,6.8) A12(2,6.8) A13(2.8,6.8) A14(3.6,6.8) A15(4.4,6.8) A16(5.2,6.8) A17(6,6.8) A18(6.8,6.8) B1(-6.8,6) B2(-6,6) B3(-5.2,6) B4(-4.4,6) B5(-3.6,6) B6(-2.8,6) B7(-2,6) B8(-1.2,6) B9(-0.4,6) B10(0.4,6) B11(1.2,6) B12(2,6) B13(2.8,6) B14(3.6,6) B15(4.4,6) B16(5.2,6) B17(6,6) B18(6.8,6) C1(-6.8,5.2) C2(-6,5.2) C3(-5.2,5.2) C4(-4.4,5.2) C5(-3.6,5.2) C6(-2.8,5.2) C7(-2,5.2) C8(-1.2,5.2) C9(-0.4,5.2) C10(0.4,5.2) C11(1.2,5.2) C12(2,5.2) C13(2.8,5.2) C14(3.6,5.2) C15(4.4,5.2) C16(5.2,5.2) C17(6,5.2) C18(6.8,5.2) D1(-6.8,4.4) D2(-6,4.4) D3(-5.2,4.4) D4(-4.4,4.4) D5(-3.6,4.4) D6(-2.8,4.4) D7(-2,4.4) D8(-1.2,4.4) D9(-0.4,4.4) D10(0.4,4.4) D11(1.2,4.4) D12(2,4.4) D13(2.8,4.4) D14(3.6,4.4) D15(4.4,4.4) D16(5.2,4.4) D17(6,4.4) D18(6.8,4.4) E1(-6.8,3.6) E2(-6,3.6) E3(-5.2,3.6) E4(-4.4,3.6) E5(-3.6,3.6) E6(-2.8,3.6) E7(-2,3.6) E8(-1.2,3.6) E9(-0.4,3.6) E10(0.4,3.6) E11(1.2,3.6) E12(2,3.6) E13(2.8,3.6) E14(3.6,3.6) E15(4.4,3.6) E16(5.2,3.6) E17(6,3.6) E18(6.8,3.6) F1(-6.8,2.8) F2(-6,2.8) F3(-5.2,2.8) F4(-4.4,2.8) F5(-3.6,2.8) F6(-2.8,2.8) F7(-2,2.8) F8(-1.2,2.8) F9(-0.4,2.8) F10(0.4,2.8) F11(1.2,2.8) F12(2,2.8) F13(2.8,2.8) F14(3.6,2.8) F15(4.4,2.8) F16(5.2,2.8) F17(6,2.8) F18(6.8,2.8) G1(-6.8,2) G2(-6,2) G3(-5.2,2) G4(-4.4,2) G5(-3.6,2) G6(-2.8,2) G7(-2,2) G8(-1.2,2) G9(-0.4,2) G10(0.4,2) G11(1.2,2) G12(2,2) G13(2.8,2) G14(3.6,2) G15(4.4,2) G16(5.2,2) G17(6,2) G18(6.8,2) H1(-6.8,1.2) H2(-6,1.2) H3(-5.2,1.2) H4(-4.4,1.2) H5(-3.6,1.2) H6(-2.8,1.2) H7(-2,1.2) H8(-1.2,1.2) H9(-0.4,1.2) H10(0.4,1.2) H11(1.2,1.2) H12(2,1.2) H13(2.8,1.2) H14(3.6,1.2) H15(4.4,1.2) H16(5.2,1.2) H17(6,1.2) H18(6.8,1.2) J1(-6.8,0.4) J2(-6,0.4) J3(-5.2,0.4) J4(-4.4,0.4) J5(-3.6,0.4) J6(-2.8,0.4) J7(-2,0.4) J8(-1.2,0.4) J9(-0.4,0.4) J10(0.4,0.4) J11(1.2,0.4) J12(2,0.4) J13(2.8,0.4) J14(3.6,0.4) J15(4.4,0.4) J16(5.2,0.4) J17(6,0.4) J18(6.8,0.4) K1(-6.8,-0.4) K2(-6,-0.4) K3(-5.2,-0.4) K4(-4.4,-0.4) K5(-3.6,-0.4) K6(-2.8,-0.4) K7(-2,-0.4) K8(-1.2,-0.4) K9(-0.4,-0.4) K10(0.4,-0.4) K11(1.2,-0.4) K12(2,-0.4) K13(2.8,-0.4) K14(3.6,-0.4) K15(4.4,-0.4) K16(5.2,-0.4) K17(6,-0.4) K18(6.8,-0.4) L1(-6.8,-1.2) L2(-6,-1.2) L3(-5.2,-1.2) L4(-4.4,-1.2) L5(-3.6,-1.2) L6(-2.8,-1.2) L7(-2,-1.2) L8(-1.2,-1.2) L9(-0.4,-1.2) L10(0.4,-1.2) L11(1.2,-1.2) L12(2,-1.2) L13(2.8,-1.2) L14(3.6,-1.2) L15(4.4,-1.2) L16(5.2,-1.2) L17(6,-1.2) L18(6.8,-1.2) M1(-6.8,-2) M2(-6,-2) M3(-5.2,-2) M4(-4.4,-2) M5(-3.6,-2) M6(-2.8,-2) M7(-2,-2) M8(-1.2,-2) M9(-0.4,-2) M10(0.4,-2) M11(1.2,-2) M12(2,-2) M13(2.8,-2) M14(3.6,-2) M15(4.4,-2) M16(5.2,-2) M17(6,-2) M18(6.8,-2) N1(-6.8,-2.8) N2(-6,-2.8) N3(-5.2,-2.8) N4(-4.4,-2.8) N5(-3.6,-2.8) N6(-2.8,-2.8) N7(-2,-2.8) N8(-1.2,-2.8) N9(-0.4,-2.8) N10(0.4,-2.8) N11(1.2,-2.8) N12(2,-2.8) N13(2.8,-2.8) N14(3.6,-2.8) N15(4.4,-2.8) N16(5.2,-2.8) N17(6,-2.8) N18(6.8,-2.8) P1(-6.8,-3.6) P2(-6,-3.6) P3(-5.2,-3.6) P4(-4.4,-3.6) P5(-3.6,-3.6) P6(-2.8,-3.6) P7(-2,-3.6) P8(-1.2,-3.6) P9(-0.4,-3.6) P10(0.4,-3.6) P11(1.2,-3.6) P12(2,-3.6) P13(2.8,-3.6) P14(3.6,-3.6) P15(4.4,-3.6) P16(5.2,-3.6) P17(6,-3.6) P18(6.8,-3.6) R1(-6.8,-4.4) R2(-6,-4.4) R3(-5.2,-4.4) R4(-4.4,-4.4) R5(-3.6,-4.4) R6(-2.8,-4.4) R7(-2,-4.4) R8(-1.2,-4.4) R9(-0.4,-4.4) R10(0.4,-4.4) R11(1.2,-4.4) R12(2,-4.4) R13(2.8,-4.4) R14(3.6,-4.4) R15(4.4,-4.4) R16(5.2,-4.4) R17(6,-4.4) R18(6.8,-4.4) T1(-6.8,-5.2) T2(-6,-5.2) T3(-5.2,-5.2) T4(-4.4,-5.2) T5(-3.6,-5.2) T6(-2.8,-5.2) T7(-2,-5.2) T8(-1.2,-5.2) T9(-0.4,-5.2) T10(0.4,-5.2) T11(1.2,-5.2) T12(2,-5.2) T13(2.8,-5.2) T14(3.6,-5.2) T15(4.4,-5.2) T16(5.2,-5.2) T17(6,-5.2) T18(6.8,-5.2) U1(-6.8,-6) U2(-6,-6) U3(-5.2,-6) U4(-4.4,-6) U5(-3.6,-6) U6(-2.8,-6) U7(-2,-6) U8(-1.2,-6) U9(-0.4,-6) U10(0.4,-6) U11(1.2,-6) U12(2,-6) U13(2.8,-6) U14(3.6,-6) U15(4.4,-6) U16(5.2,-6) U17(6,-6) U18(6.8,-6) V1(-6.8,-6.8) V2(-6,-6.8) V3(-5.2,-6.8) V4(-4.4,-6.8) V5(-3.6,-6.8) V6(-2.8,-6.8) V7(-2,-6.8) V8(-1.2,-6.8) V9(-0.4,-6.8) V10(0.4,-6.8) V11(1.2,-6.8) V12(2,-6.8) V13(2.8,-6.8) V14(3.6,-6.8) V15(4.4,-6.8) V16(5.2,-6.8) V17(6,-6.8) V18(6.8,-6.8)
  silkscreen extent -8.27,-7.5 7.5,7.5, body extent -7.5,-7.5 7.5,7.5, height 1.5
HDR2X18 [mm] "Connector; Header; 18x2 Position"
  rect 1.5x1.5 hole 0.9: 1(0,0)
  round 1.5 hole 0.9: 2(0,2.54) 3(2.54,0) 4(2.54,2.54) 5(5.08,0) 6(5.08,2.54) 7(7.62,0) 8(7.62,2.54) 9(10.16,0) 10(10.16,2.54) 11(12.7,0) 12(12.7,2.54) 13(15.24,0) 14(15.24,2.54) 15(17.78,0) 16(17.78,2.54) 17(20.32,0) 18(20.32,2.54) 19(22.86,0) 20(22.86,2.54) 21(25.4,0) 22(25.4,2.54) 23(27.94,0) 24(27.94,2.54) 25(30.48,0) 26(30.48,2.54) 27(33.02,0) 28(33.02,2.54) 29(35.56,0) 30(35.56,2.54) 31(38.1,0) 32(38.1,2.54) 33(40.64,0) 34(40.64,2.54) 35(43.18,0) 36(43.18,2.54)
  silkscreen extent -1.27,-1.27 44.45,3.81
"HDR 1X6" [mil]
  rect 60x60 hole 35: 1(0,0)
  round 60 hole 35: 2(100,0) 3(200,0) 4(300,0) 5(400,0) 6(500,0)
  silkscreen extent -50,-50 550,50
"HEADER 40P MALE" [mm] "HEADER 2X20P 2.0MM MALE"
  rect 2x0.9 smd: 1(0,0) 2(-5.2,0) 3(0,-2) 4(-5.2,-2) 5(0,-4) 6(-5.2,-4) 7(0,-6) 8(-5.2,-6) 9(0,-8) 10(-5.2,-8) 11(0,-10) 12(-5.2,-10) 13(0,-12) 14(-5.2,-12) 15(0,-14) 16(-5.2,-14) 17(0,-16) 18(-5.2,-16) 19(0,-18) 20(-5.2,-18) 21(0,-20) 22(-5.2,-20) 23(0,-22) 24(-5.2,-22) 25(0,-24) 26(-5.2,-24) 27(0,-26) 28(-5.2,-26) 29(0,-28) 30(-5.2,-28) 31(0,-30) 32(-5.2,-30) 33(0,-32) 34(-5.2,-32) 35(0,-34) 36(-5.2,-34) 37(0,-36) 38(-5.2,-36) 39(0,-38) 40(-5.2,-38)
  silkscreen extent -3.8,-39 0.5,1.3
LED-0805 [mil]
  rect 50x55 smd: 1(-45,0) 2(45,0)
  silkscreen extent -61,-42 45,35, body extent -40,-25 40,25, height 43
"PowerPAK 1212-8" [mm]
  rect 1.725x0.99 smd mask+0.05: D1(0.442,0.627) D2(0.441,-0.623)
  rect 1x0.405 smd mask+0.05: D1(1.501,0.969) D1(1.502,0.332) D2(1.501,-0.331) D2(1.502,-0.98)
  rect 1.1x0.405 smd mask+0.05: G1(-1.501,0.325) G2(-1.501,-0.975) S1(-1.501,0.975) S2(-1.501,-0.325)
  silkscreen extent -2.31,-1.78 2.21,1.8, body extent -1.8,-1.63 1.73,1.6, height 1.04
TP [mil]
  round 30 smd: 1(0,0)
  silkscreen extent -20,-20 20,20
XAL6030-222MEB [mm] "Precision Wire Wound Inductor, 2-Leads, Body 6.36x6.56mm, IPC Medium Density"
  rect 1.5x5.5 smd: 1(-2.02,0) 2(2.02,0)
  silkscreen extent -3.2,-3.3 3.2,3.3, body extent -3.18,-3.28 3.18,3.28, height 3.1
XCF08PFSG48C [mil] "BGA, 48-Leads, Body 9x8mm, Pitch 0.8mm"
  round 14 smd mask+2: A1(-78.74,110.24) A2(-47.24,110.24) A3(-15.75,110.24) A4(15.75,110.24) A5(47.24,110.24) A6(78.74,110.24) B1(-78.74,78.74) B2(-47.24,78.74) B3(-15.75,78.74) B4(15.75,78.74) B5(47.24,78.74) B6(78.74,78.74) C1(-78.74,47.24) C2(-47.24,47.24) C3(-15.75,47.24) C4(15.75,47.24) C5(47.24,47.24) C6(78.74,47.24) D1(-78.74,15.75) D2(-47.24,15.75) D3(-15.75,15.75) D4(15.75,15.75) D5(47.24,15.75) D6(78.74,15.75) E1(-78.74,-15.75) E2(-47.24,-15.75) E3(-15.75,-15.75) E4(15.75,-15.75) E5(47.24,-15.75) E6(78.74,-15.75) F1(-78.74,-47.24) F2(-47.24,-47.24) F3(-15.75,-47.24) F4(15.75,-47.24) F5(47.24,-47.24) F6(78.74,-47.24) G1(-78.74,-78.74) G2(-47.24,-78.74) G3(-15.75,-78.74) G4(15.75,-78.74) G5(47.24,-78.74) G6(78.74,-78.74) H1(-78.74,-110.24) H2(-47.24,-110.24) H3(-15.75,-110.24) H4(15.75,-110.24) H5(47.24,-110.24) H6(78.74,-110.24)
  silkscreen extent -188,-177 157,177, body extent -157,-177 157,177, height 47
XFL4020-472MEB [mm]
  rect 0.98x3.4 smd: 1(-1.185,0) 2(1.185,0)
  silkscreen extent -2,-2 2,2, body extent -2,-2 2,2, height 2.1

## Part data
3 9L1 9L2 10L2 10L3 10L4 10L5 10L6: library part FB, "FERRITE BEAD 22 OHM 0805 1LN", MANUFACTURE="Assembly House", NO_LOAD=LOAD, PART_NUMBER=BLM21PG220SN1D
9C7 9C8 9C9 9C10 9C11 9C13 9C14 9C15: library part CAP, "CAP CER 10V 10% 0402"
9J5: library part J6x1, "CONNECTOR HEADER 1x6 PITCH 2.54"
9P1: "Header, 18-Pin, Dual row", LatestRevisionDate=17-Jul-2002, LatestRevisionNote="Re-released for DXP Platform.", Publisher="Altium Limited"
9R15 9R16 9R17 9R18 9R19: library part RES, "RES 1/8W 5% 0603"
  9R18 9R19: LOAD=NO_LOAD
9U2 9U6: library part CRYSTAL2
  9U6: LOAD=NO_LOAD
10C1 10C10 10C19 10C28 10C37 10C53: library part TCTAL0J107M8R, "CAP TANT 100UF 6.3V 20% 1206", MANUFACTURE="Assembly House", NO_LOAD=LOAD, PART_NUMBER=TCTAL0J107M8R
10C2 10C11 10C20 10C29 10C38 10C54: library part "Cap Semi", "CAP CER .47UF 6.3V 10% X5R 0402", MANUFACTURE="Assembly House", NO_LOAD=LOAD, PART_NUMBER=GRM155R60J474KE19D
10C3 10C12 10C21 10C30 10C39 10C46 10C55 10C62: library part "Cap Semi", "CAP CER .1UF 10V 10% X5R 0402", MANUFACTURE="Assembly House", NO_LOAD=LOAD, PART_NUMBER=GRM155R61A104KA01D
10C4 10C5 10C6 10C7 10C8 10C9 10C13 10C14 10C15 10C16 10C17 10C18 10C22 10C23 10C24 10C25 10C26 10C27 10C31 10C32 10C33 10C34 10C35 10C36 10C40 10C41 10C42 10C43 10C44 10C45 10C47 10C48 10C49 10C50 10C51 10C52 10C56 10C57 10C58 10C59 10C60 10C61 10C63 10C64 10C65 10C66 10C67: library part "Cap Semi", "CAP CER 10000PF 6.3V 10% X5R 0402", MANUFACTURE="Samsung Electro-Mechanics", NO_LOAD=LOAD, PART_NUMBER=CL03A103KQ3NNNC
10U7: "IC REG CTRLR BUCK 48LFCSP", MANUFACTURE="Analog Devices Inc", NO_LOAD=LOAD, PART_NUMBER=ADP5054ACPZ-R7
C1006 C1008 C1011 C1012: library part CAP_2, "CAP CER 10UF 10V 10% X5R 0805", MANUFACTURE="Murata Electronics North America", NO_LOAD=LOAD, PART_NUMBER=GRM21BR61A106KE19L
C1007 C1009 C1010 C1013: library part Cap_6, "CAP CER 2200PF 10V X5R 0201", MANUFACTURE="Assembly House", NO_LOAD=LOAD, PART_NUMBER=GRM033R61A222KA01D
C1014 C1015: library part CAP_2, "CAP CER 1UF 10V X5R 0402", MANUFACTURE="Murata Electronics North America", NO_LOAD=LOAD, PART_NUMBER=GRM153R61A105ME95D
C1016 C1019 C1022 C1025: library part Cap_6, "CAP CER .1UF 10V 10% X5R 0402", MANUFACTURE="Assembly House", NO_LOAD=LOAD, PART_NUMBER=GRM155R61A104KA01D
C1017 C1018 C1020 C1021 C1023 C1024 C1026 C1027: library part CAP_1, "CAP CER 47UF 6.3V X5R 0805", MANUFACTURE="Assembly House", NO_LOAD=LOAD, PART_NUMBER=GRM21BR60J476ME15K
L218 L224: library part IHLP1212BZER1R0M11, "Fixed Inductors 2.2uH 20% 10A 13.97mOhms AEC-Q200", MANUFACTURE=Coilcraft, NO_LOAD=LOAD, PART_NUMBER=XAL6030-222MEB
L219 L221 L223 L225: library part "FERRITE BEAD", "FERRITE BEAD 22 OHM 0805 1LN", MANUFACTURE="Assembly House", NO_LOAD=LOAD, PART_NUMBER=BLM21PG220SN1D
L220 L222: library part IHLP1212BZER1R0M11, "Fixed Inductors 4.7uH 20% 5A 57.4mOhms AEC-Q200", MANUFACTURE=Coilcraft, NO_LOAD=LOAD, PART_NUMBER=XFL4020-472MEB
LED5: library part LED, "LED GREEN CLEAR 0805 SMD", MANUFACTURE="Lite-On Inc", NO_LOAD=LOAD, PART_NUMBER=LTST-C171GKT
P1 P2: "Header, 20-Pin, Dual row", LatestRevisionDate=17-Jul-2002, LatestRevisionNote="Re-released for DXP Platform.", Publisher="Altium Limited"
Q2: "MOSFET 2N-CH 20V 25A PPAK 1212-8", MANUFACTURE="Vishay Siliconix", NO_LOAD=LOAD, PART_NUMBER=SI7232DN-T1-GE3
R1116 R1119 R1121 R1124: library part Res1, "RES 10K OHM 1% 1/10W 0402", MANUFACTURE="Panasonic Electronic Components", NO_LOAD=LOAD, PART_NUMBER=ERJ-2RKF1002X
R1117 R1120 R1125 R1154: library part RES1, "RES 33 OHM 5% 1/16W 0402", MANUFACTURE="Assembly House", NO_LOAD=LOAD, PART_NUMBER=RC0402JR-0733RL
R1123 R1137 R1144 R11118: library part Res1_1, "RES 0.0 OHM 1/16W 0402 SMD", MANUFACTURE="Assembly House", PART_NUMBER=RC0402JR-070RL
  R1123 R1137 R11118: NO_LOAD=LOAD
  R1144: NO_LOAD="NO LOAD"
R1126 R1134: library part Res1, "RES SMD 10K OHM 1% 1/10W 0402", MANUFACTURE="Panasonic Electronic Components", NO_LOAD=LOAD, PART_NUMBER=ERJ-2RKF1202X
R1127: library part Res1_1, "RES SMD 20K OHM 1% 1/10W 0402", MANUFACTURE="Panasonic Electronic Components", NO_LOAD=LOAD, PART_NUMBER=ERJ-2GEJ473X
R1128 R1129: library part Res1_1, "RES SMD 22K OHM 5% 1/10W 0402", MANUFACTURE="Panasonic Electronic Components", NO_LOAD=LOAD, PART_NUMBER=ERJ-2GEJ223X
R1130: library part Res1_1, "RES SMD 47K OHM 1% 1/10W 0402", MANUFACTURE="Panasonic Electronic Components", NO_LOAD=LOAD, PART_NUMBER=ERJ-2GEJ473X
R1131 R1132: library part Res1_1, "RES SMD 15K OHM 1% 1/10W 0402", MANUFACTURE="Panasonic Electronic Components", NO_LOAD=LOAD, PART_NUMBER=ERJ-2RKF1502X
R1133: library part Res1, "RES SMD 12K OHM 1% 1/10W 0402", MANUFACTURE="Panasonic Electronic Components", NO_LOAD=LOAD, PART_NUMBER=ERJ-2RKF1202X
R1135: library part Res1_1, "RES SMD 4.7K OHM 1% 1/10W 0402", MANUFACTURE="Panasonic Electronic Components", NO_LOAD=LOAD, PART_NUMBER=ERJ-2GEJ473X
R1136: library part Res1_1, "RES SMD 32.4K OHM 1% 1/10W 0402", MANUFACTURE="Panasonic Electronic Components", NO_LOAD=LOAD, PART_NUMBER=ERJ-2RKF3242X
R1138: library part R, "RES 2.2K OHM 5% 1/10W 0402", MANUFACTURE="Assembly House", NO_LOAD=LOAD, PART_NUMBER=ERJ-2GEJ222X
TP9 TP11 TP12 TP13 TP14 TP15 TP110: library part TP, "CONNECT 1"
U11: "Spartan-6 LX 1.2V FPGA, 218 User I/Os, 324-Ball Chip-Scale BGA (0.8mm Pitch), Speed Grade 2, Commercial Grade, Pb-Free", Supplier Part Number 1=1762496, Code_JEDEC=MO-275-KKAC-1, ComponentLink1Description="Manufacturer Link", ComponentLink1URL=http://www.xilinx.com, ComponentLink2Description="Spartan-6 Datasheet", ComponentLink2URL=http://www.xilinx.com/support/documentation/data_sheets/ds160.pdf, ComponentLink3Description="Spartan-6 Documents", ComponentLink3URL=http://www.xilinx.com/support/documentation/spartan-6.htm, ComponentLink4Description="Xilinx.com Home", ComponentLink4URL=http://www.xilinx.com, DatasheetVersion="ver1.6, Nov-2010", PackageDescription="324-Ball Chip-Scale BGA (CSG324) Package, 0.8 mm Pitch", PackageReference=CSG324, PackageVersion="ver1.1, Nov-2009", Published=17-Nov-2009, Publisher="Altium Limited", Supplier 1=Farnell
U12: "XCF00P Series, Platform Flash In-System Programmable Configuration 1.8V PROM, 48 Ball BGA, 8-Megabit, Commercial Grade, Pb-Free", Supplier Part Number 1=122-1453-ND, Code_JEDEC=MO-210-AD, ComponentLink1Description="Platform Flash Datasheet", ComponentLink1URL=http://www.xilinx.com/support/documentation/data_sheets/ds123.pdf, ComponentLink2Description="FSG48 Package Drawing", ComponentLink2URL=http://www.xilinx.com/support/documentation/package_specs/fs48.pdf, ComponentLink3Description="Configuration PROM Documents", ComponentLink3URL=http://www.xilinx.com/support/documentation/configuration_proms.htm, ComponentLink4Description="Xilinx.com Home", ComponentLink4URL=http://www.xilinx.com, DatasheetVersion="ver2.17, Oct-2009", FirstPublished=4-Mar-2005, LatestRevisionDate=16-Nov-2009, LatestRevisionNote="Updated to datasheet version 2.17, Oct-2009.", PackageDescription="48-Ball Chip Scale Ball Grid Array 0.8 mm Pitch (FSG48) - Pb-Free", PackageReference=FSG48, PackageVersion="ver1.0.1, Apr-2005", Publisher="Altium Limited", Supplier 1=Digi-Key
9C2 9C12: CAP=104

## Via types
v1: diameter 16, hole 8, TOP to BOTTOM, 150 vias
v2: diameter 40, hole 25, TOP to BOTTOM, 114 vias
v3: diameter 19, hole 10, TOP to BOTTOM, 44 vias
v4: diameter 40, hole 20, TOP to BOTTOM, 44 vias
v5: diameter 20, hole 10, TOP to BOTTOM, 23 vias
v6: diameter 16, hole 10, TOP to BOTTOM, 2 vias

## Nets (pads, with @x,y where several pads share a name; then routed paths per layer and width w, separated by ;. In a path a pad name is that pad's centre, name@x,y a point inside that pad or via, vN(x,y) a via of type N, cw(c..) or ccw(c..) an arc to the next point about the centre after c; other vN are vias at no path point)
1.8V_F: 9C7.2 9C8.2 9C13.2 9L1.1 U12.B1 U12.E1 U12.G6 | length 201.9
  TOP w12: v1(803.15,960.63) U12.B1@818.9,944.88 ; v1(897.64,960.63) U12.E1@913.39,944.88 ; v1(960.63,1118.11) U12.G6@976.38,1102.36
  BOTTOM w12: v1(803.15,960.63) 9C7.2@830.71,960.63 9C7.2@834.65,960.63 ; v1(897.64,960.63) 897.64,959.55 905.51,951.67 9C8.2@905.51,933.07 ; v1(960.63,1118.11) 9C13.2@960.63,1145.67
  BOTTOM w27: 9L1.1@1021.62,840.58 v2(1021.62,885.79)
2.048MHz: 9U2.3 U11.H17 | length 552.9
  TOP w6: U11.H17@1240.16,1543.31 1224.41,1527.56 1224.41,1358.27 1440.94,1141.73 9U2.3@1496.06,1141.73
50MHz: 9U6.3 U11.L15 | length 479.2
  TOP w6: U11.L15@1145.67,1606.3 1161.42,1590.55 1161.42,1318.9 1181.1,1299.21 9U6.3@1181.1,1141.73
+5VCC: 10U7.6 10U7.7 10U7.22 10U7.23 10U7.24 10U7.36 10U7.37 10U7.38 C1006.1 C1008.1 C1011.1 C1012.1 P1.1 P1.3 P1.5 P1.7 TP9.1
  other v2: 1093.44,247.01 1093.44,290.32 1031.5,570.87 1031.5,641.73 118.11,1830.71 118.11,1889.76 118.11,1948.82 118.11,2007.87 118.11,2066.93 118.11,2125.98
  other v3: 1454.66,417.29 1478.28,417.29 1501.9,417.29 1525.52,417.29 1547.18,417.29
CFPGA_1.2V: 10L6.2 L219.2 R1125.1 | length 1594.8
  TOP w5: R1125.1@1384.78,672.8 v3(1384.78,697.8)
  BOTTOM w10: 834.65,230.32 834.65,131.89 893.7,72.83 1484.25,72.83 1582.68,171.26 1582.68,584.65 1523.62,643.7 1438.87,643.7 v3(1384.78,697.8)
  other v2: 903.48,218.47 946.78,218.47 586.61,2244.09 586.61,2291.34 649.61,2291.34
CFPGA_2.5V: 10L5.2 L225.2 R1120.1 | length 529.1
  TOP w5: R1120.1@1148.55,672.8 v3(1148.55,697.8)
  PWR1 w10: v3(1148.55,697.8) 1148.55,727.29 1255.91,834.65 1578.74,834.65
  other v2: 1781.43,372.01 1832.61,372.01 582.68,1425.2 582.68,1476.38
  other v5: 622.05,1480.32
CFPGA_3.3V: 3.2 9C2.2 9C12.2 9J5.1 9L2.1 9P1.33 9R18.1 9R19.1 9U2.4 9U6.4 10L2.2 10L3.2 10L4.2 L221.2 P2.37 P2.38 P2.39 P2.40 | length 234.3
  TOP w30: 9C12.2@1185.04,842.52 9R19.1@1283.46,842.52
  BOTTOM w27: v2@866.14,765.75 9L2.1@923.23,765.75
  BOTTOM w35: 405.51,2066.93 v2(405.51,2145.67)
  other v2: 2125.98,374.02 2185.04,374.02 2125.98,433.07 2185.04,433.07 466.57,490.09 513.82,490.09 561.06,490.09 608.31,490.09 655.55,490.09 2125.98,492.13 2185.04,492.13 862.2,763.61 1496.24,778.56 1551.35,778.56 1122.22,865.18 1122.22,912.42 1330.71,1318.9 1330.71,1366.14 574.8,2039.37 622.05,2039.37 1775.59,2082.68 1822.83,2082.68 1334.65,2488.19
  other v5: 1322.83,2448.82 1350.39,2448.82
CFPGA_PWRGD: 10U7.17 R1138.2 R1154.1 | length 1485
  TOP w5: v3(1306.03,591.5) 1306.03,587.71 1313.91,579.84 10U7.17@1313.91,552.13 ; v3(1432.02,144.65) R1154.1@1432.02,168.95
  BOTTOM w10: R1138.2@631.82,631.85 730.25,631.85 861.03,501.07 1170.36,501.07 1212.6,543.31 1307.02,543.31 ; v3(1306.03,591.5) 1307.02,590.51 1307.02,543.31 ; v3@1433.07,141.73 1452.76,122.05 1500,122.05 1519.68,141.73 1519.68,248.03 1409.45,358.27 1409.45,492.13 1358.27,543.31 1307.02,543.31